# EAGLE board Logomatic-Panel-v27 (EAGLE 6.5.0), part 1 of 2
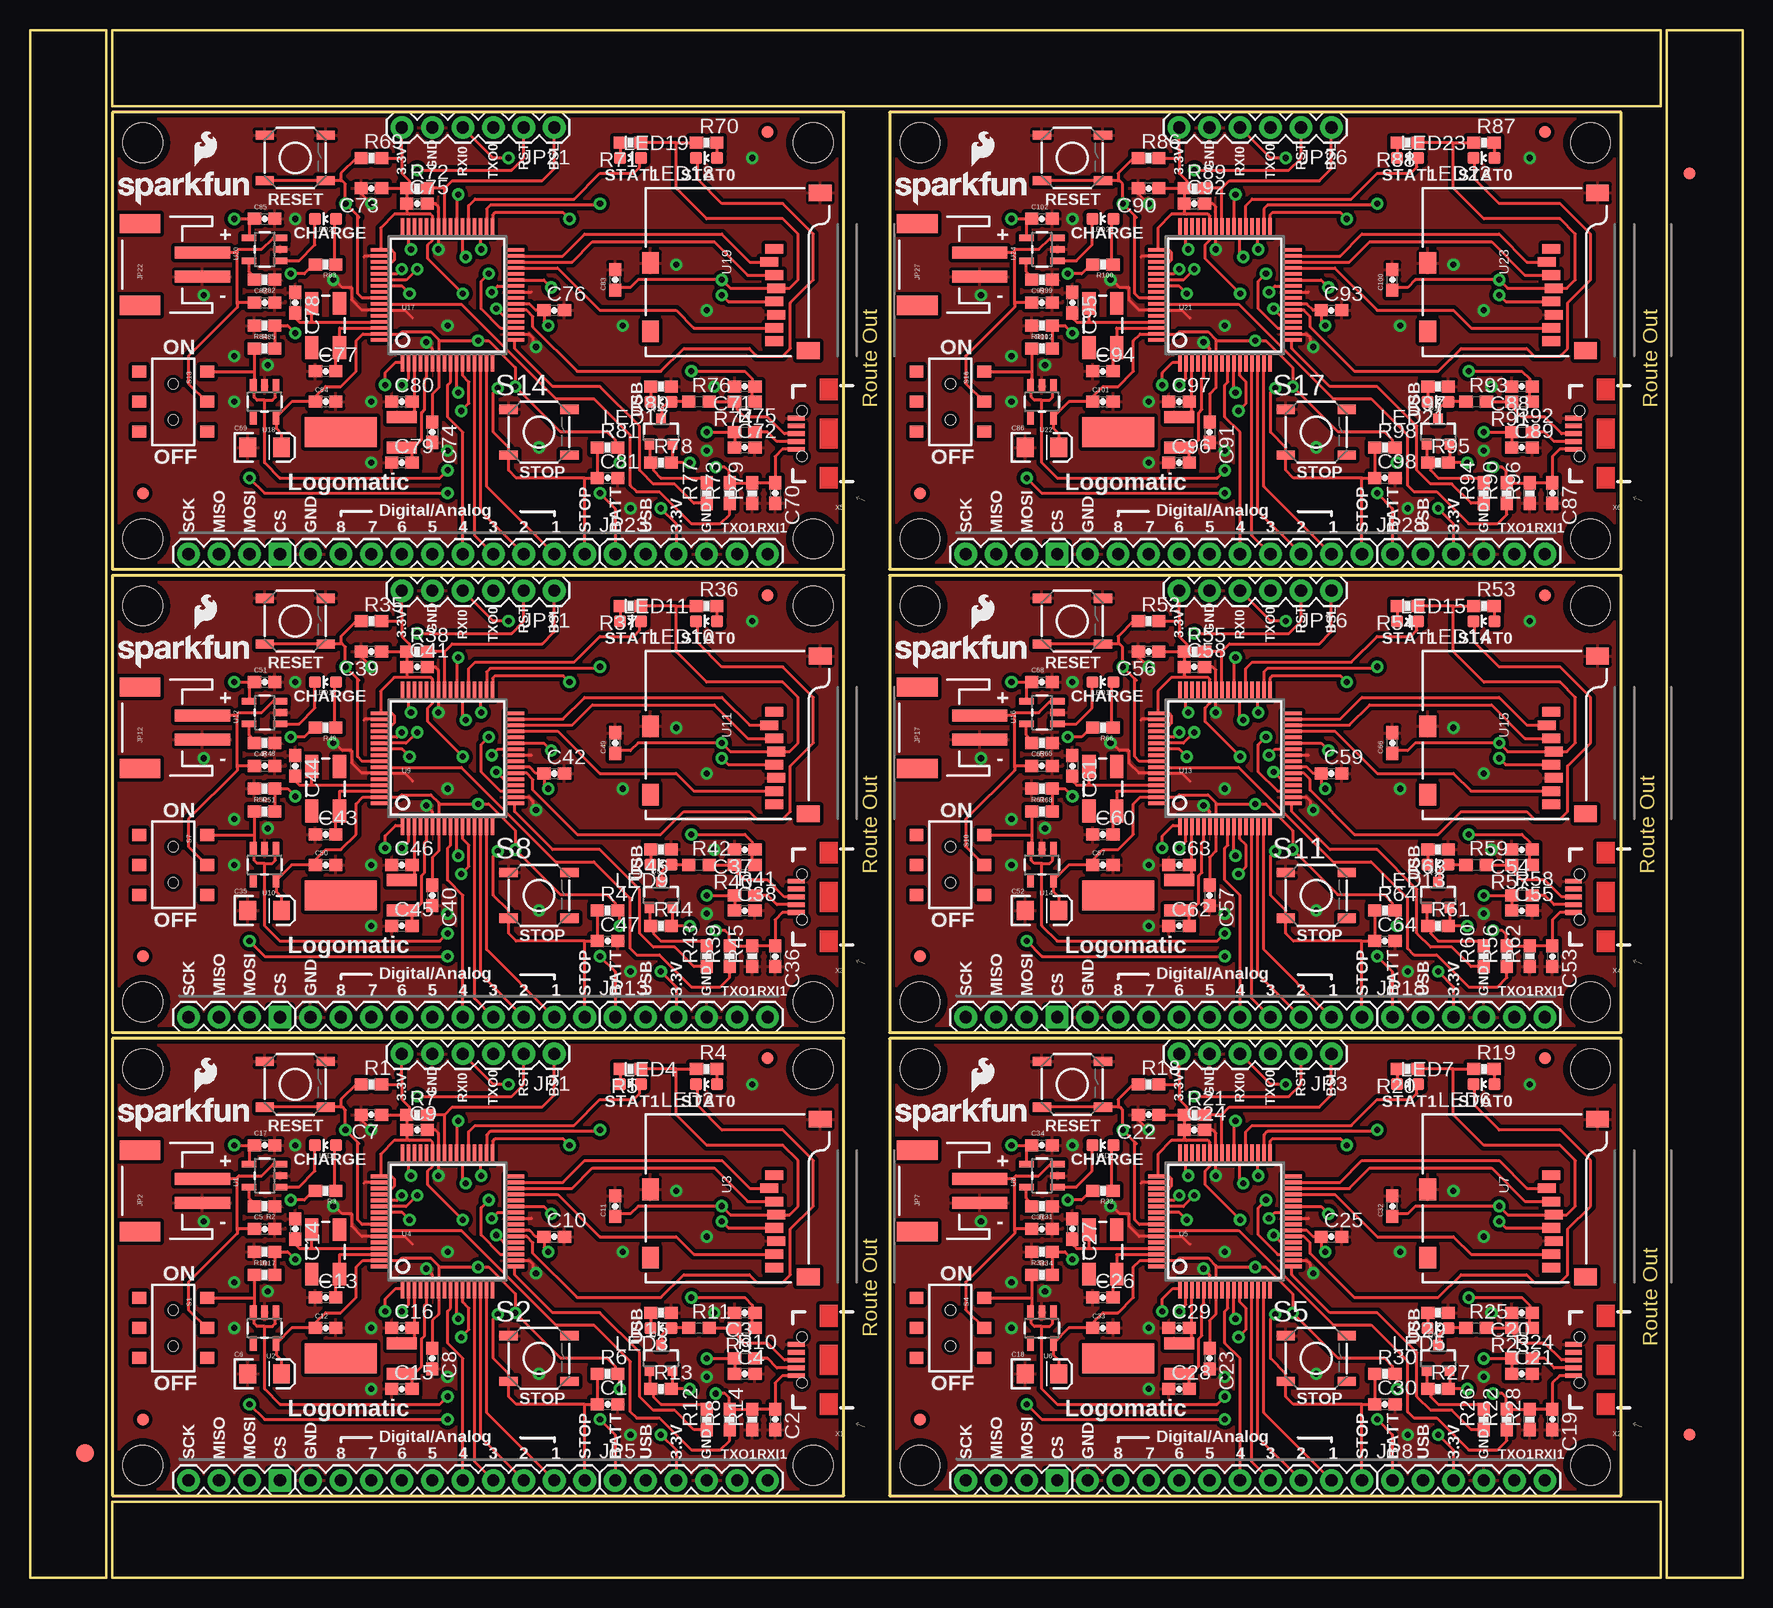
[diagram p0: board, top side]
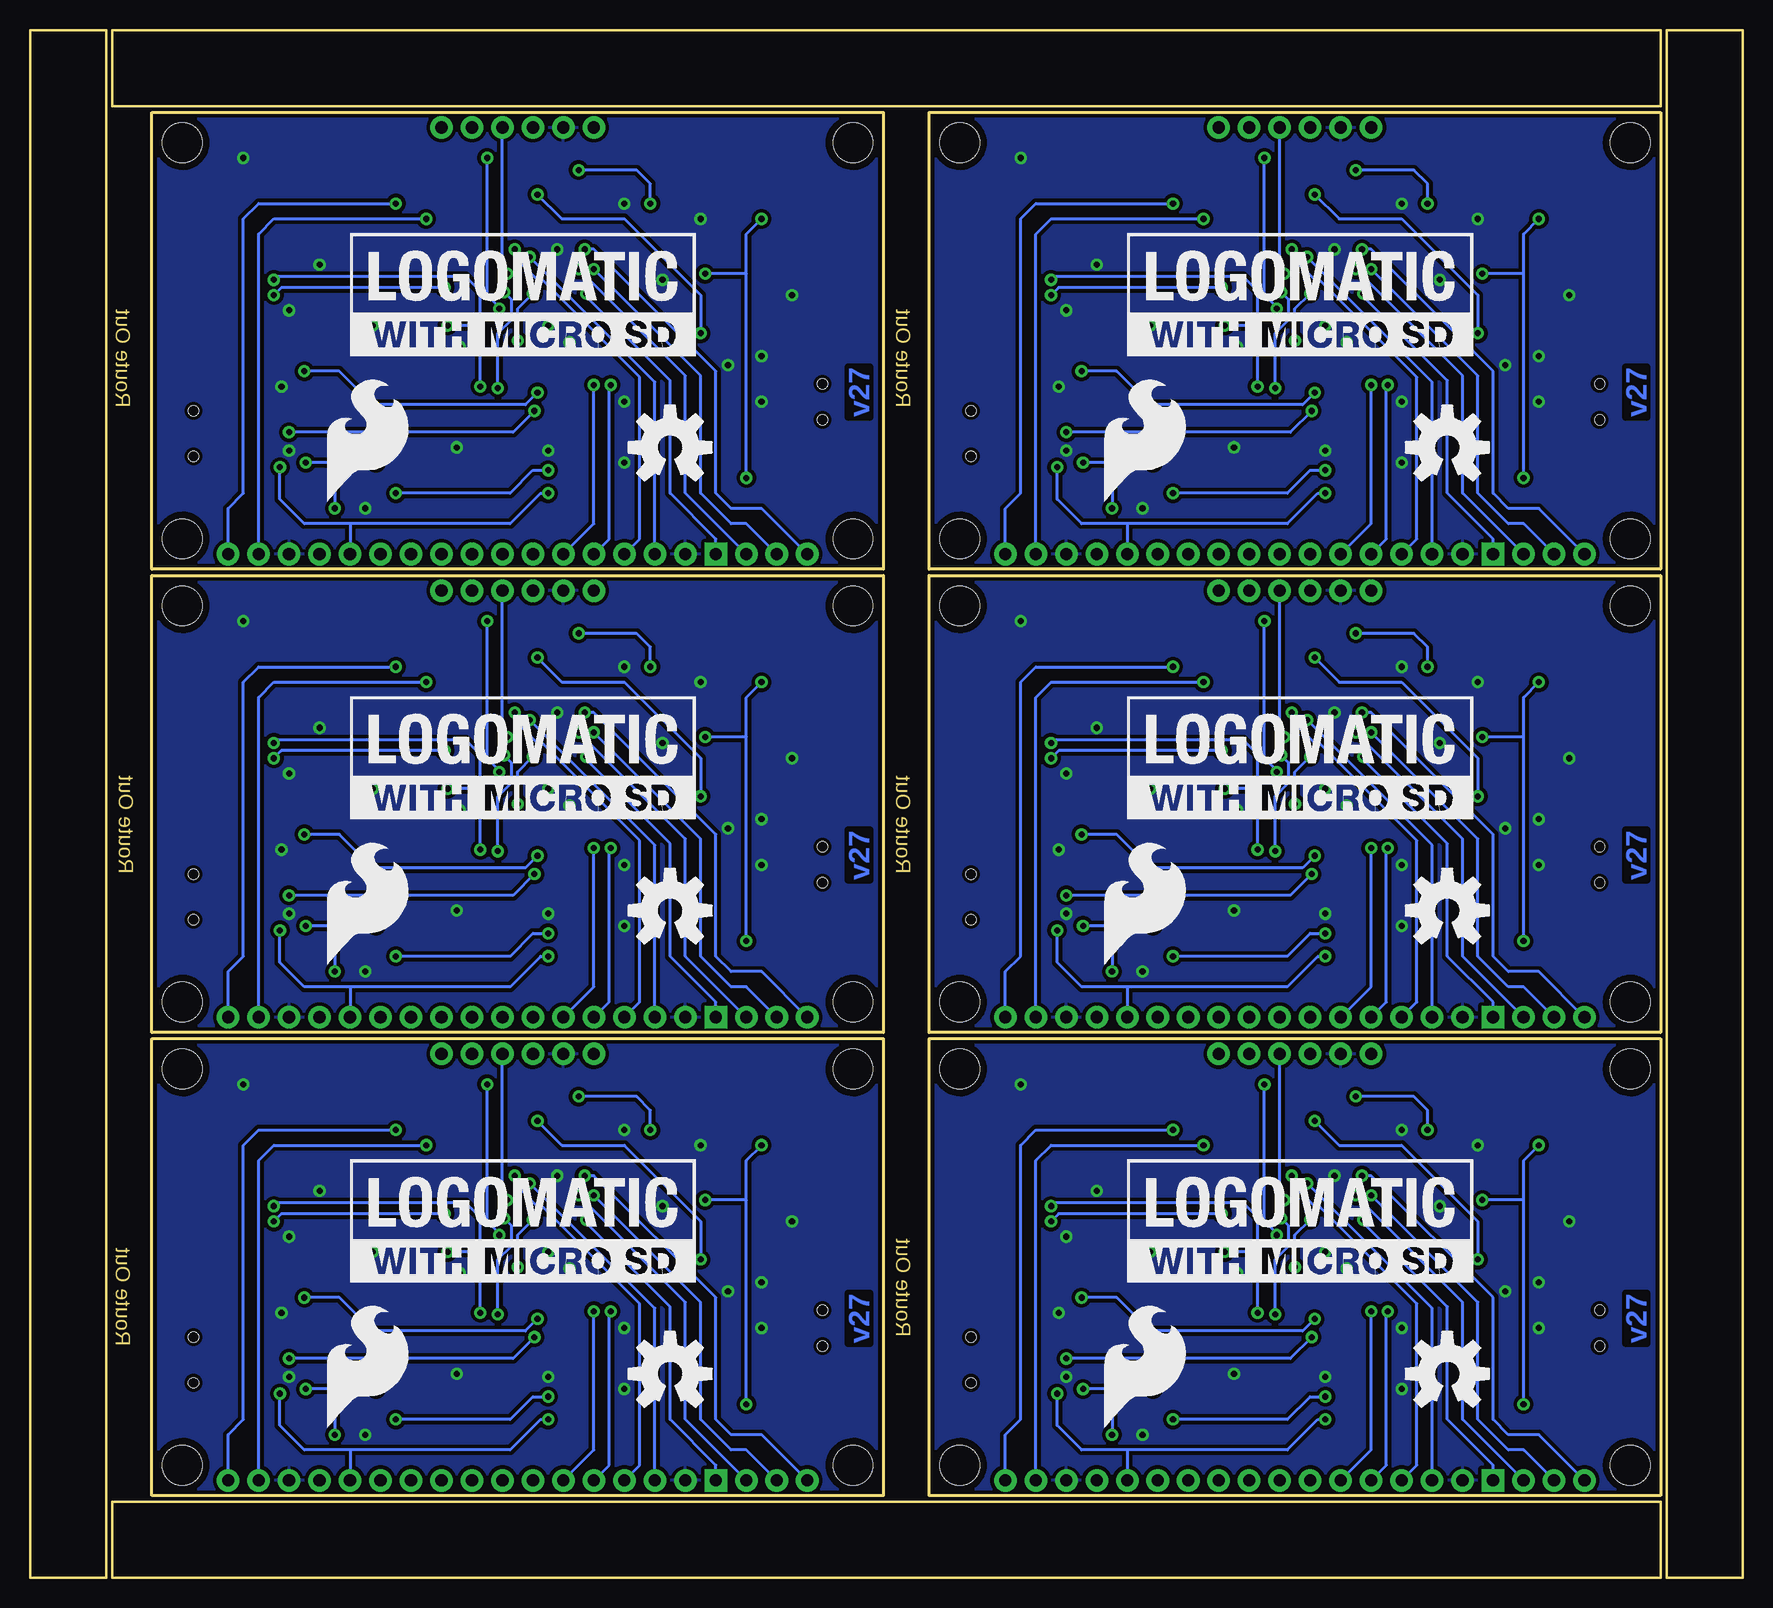
[diagram p1: board, bottom side, seen from below]

Size 142.75 x 129.03 mm. Coordinates in mm from the lower left corner, seen from the top.
Outline: 6.86,6.86 67.82,6.86 67.82,44.96 6.86,44.96 6.86,6.86
Outline: 71.63,6.86 132.59,6.86 132.59,44.96 71.63,44.96 71.63,6.86
Outline: 6.86,45.47 67.82,45.47 67.82,83.57 6.86,83.57 6.86,45.47
Outline: 71.63,45.47 132.59,45.47 132.59,83.57 71.63,83.57 71.63,45.47
Outline: 6.86,84.07 67.82,84.07 67.82,122.17 6.86,122.17 6.86,84.07
Outline: 71.63,84.07 132.59,84.07 132.59,122.17 71.63,122.17 71.63,84.07
Outline: 142.75,0 142.75,129.03 136.4,129.03 136.4,0 142.75,0
Outline: 135.89,129.03 6.86,129.03 6.86,122.68 135.89,122.68 135.89,129.03
Outline: 0,129.03 0,0 6.35,0 6.35,129.03 0,129.03
Outline: 6.86,0 135.89,0 135.89,6.35 6.86,6.35 6.86,0
Copper layers (1*16): Top 0.035mm / dielectric 1.5mm / Bottom 0.035mm
Design rules "SparkFun *": minimum track width 8mil, minimum drill 20mil, track to track 8mil, track to pad 8mil, pad to pad 7mil, via to via 8mil, smd to smd 8mil, copper to edge 10mil, drill to drill 8mil, minimum pad ring 12mil, minimum via ring 10mil, stop-mask expansion 4mil, vias tented up to drill 20mil, thermal gap 10mil
Net classes: 0 default: width 0.178 mm; 1 power: width 0.203 mm; 2 hv: width 0.254 mm, clearance 0.229 mm

## Footprints (pad centres in the part's own frame; a part is rotated, then mirrored left to right if it is on the bottom)
0603-CAP = smd 1.1 x 1: 1 -0.85,0; 2 0.85,0
EIA3216 = smd 1.4 x 1.6: A 1.4,0; C -1.4,0
FIDUCIAL-1X2 = smd 1 x 1: 1 0,0
FIDUCIAL-1.5X3 = smd 1.5 x 1.5: 1 0,0
1X06 = drill 1.016 pad 1.88: 1 0,0; 2 2.54,0; 3 5.08,0; 4 7.62,0; 5 10.16,0; 6 12.7,0
JST-2-SMD = smd 1 x 4.6: 1 -1,-3.7; 2 1,-3.7 | smd 1.6 x 3.4: NC1 -3.4,1.5; NC2 3.4,1.5
1X04 = drill 1.016 pad 1.88 square: 1 0,0 | drill 1.016 pad 1.88: 2 2.54,0; 3 5.08,0; 4 7.62,0
1X10 = drill 1.016 pad 1.88: 1 0,0; 2 2.54,0; 3 5.08,0; 4 7.62,0; 5 10.16,0; 6 12.7,0; 7 15.24,0; 8 17.78,0; 9 20.32,0; 10 22.86,0
LED-0603 = smd 1 x 1: A 0,-0.877; C 0,0.877
CRYSTAL-SMD-5X3 = smd 1.9 x 1.1: 1 -1.85,-1.15; 2 1.85,-1.15; 3 1.85,1.15; 4 -1.85,1.15
CRYSTAL-32KHZ-SMD = smd 2.5 x 6: SHEILD 0,5.08 | smd 1 x 2.5: X1 -1.27,0; X2 1.27,0
SOT23-3 = smd 0.8 x 0.9: 1 -0.95,-1; 2 0.95,-1; 3 0,1.1
0603-RES = smd 1.1 x 1: 1 -0.85,0; 2 0.85,0
0603 = smd 1.1 x 1: 1 -0.85,0; 2 0.85,0
AYZ0202 = smd 1 x 1.15: 1 -2.5,2.825; 2 0,2.825; 3 2.5,2.825; 4 -2.5,-2.825; 5 0,-2.825; 6 2.5,-2.825 | hole 0.85: 1.5,0; -1.5,0
TACTILE_SWITCH_SMD = smd 1.524 x 0.762: 1 -2.54,1.905; 2 2.54,1.905; 3 -2.54,-1.905; 4 2.54,-1.905
SOT23-5 = smd 0.55 x 1.2: 1 -0.95,-1.3; 2 0,-1.3; 3 0.95,-1.3; 4 0.95,1.3; 5 -0.95,1.3
MICRO-SD-SOCKET-PP = smd 0.8 x 1.5: 1 -8.94,10.7; 2 -7.84,10.3; 3 -6.74,10.7; 4 -5.64,10.9; 5 -4.54,10.7; 6 -3.44,10.9; 7 -2.34,10.7; 8 -1.24,10.7 | smd 1.8 x 1.4: CD1 -2.05,0.4; CD2 -7.75,0.4 | smd 1.4 x 1.9: GND1 -13.6,14.55; GND3 -0.45,13.55
SQFP-S-10X10-64 = smd 0.3 x 1.6: 1 -3.75,-5.6; 2 -3.25,-5.6; 3 -2.75,-5.6; 4 -2.25,-5.6; 5 -1.75,-5.6; 6 -1.25,-5.6; 7 -0.75,-5.6; 8 -0.25,-5.6; 9 0.25,-5.6; 10 0.75,-5.6; 11 1.25,-5.6; 12 1.75,-5.6; 13 2.25,-5.6; 14 2.75,-5.6; 15 3.25,-5.6; 16 3.75,-5.6; 33 3.75,5.6; 34 3.25,5.6; 35 2.75,5.6; 36 2.25,5.6; 37 1.75,5.6; 38 1.25,5.6; 39 0.75,5.6; 40 0.25,5.6; 41 -0.25,5.6; 42 -0.75,5.6; 43 -1.25,5.6; 44 -1.75,5.6; 45 -2.25,5.6; 46 -2.75,5.6; 47 -3.25,5.6; 48 -3.75,5.6 | smd 1.6 x 0.3: 17 5.6,-3.75; 18 5.6,-3.25; 19 5.6,-2.75; 20 5.6,-2.25; 21 5.6,-1.75; 22 5.6,-1.25; 23 5.6,-0.75; 24 5.6,-0.25; 25 5.6,0.25; 26 5.6,0.75; 27 5.6,1.25; 28 5.6,1.75; 29 5.6,2.25; 30 5.6,2.75; 31 5.6,3.25; 32 5.6,3.75; 49 -5.6,3.75; 50 -5.6,3.25; 51 -5.6,2.75; 52 -5.6,2.25; 53 -5.6,1.75; 54 -5.6,1.25; 55 -5.6,0.75; 56 -5.6,0.25; 57 -5.6,-0.25; 58 -5.6,-0.75; 59 -5.6,-1.25; 60 -5.6,-1.75; 61 -5.6,-2.25; 62 -5.6,-2.75; 63 -5.6,-3.25; 64 -5.6,-3.75
STAND-OFF = hole 3.302: 0,0
USB-B-MICRO-SMD_V03 = smd 1.4 x 0.4: D+1 2.7,0; D-1 2.7,0.65; GND1 2.7,-1.3; ID1 2.7,-0.65; VBUS1 2.7,1.3 | hole 0.85: 2.2,1.9; 2.2,-1.9

## Placement (x,y rotation side)
C1  0.1uF  [0603-CAP]  48.13,14.48 0 top
C2  0.1uF  [0603-CAP]  62.1,13.21 270 top
C3  18pF  [0603-CAP]  59.56,22.1 180 top
C4  18pF  [0603-CAP]  59.56,17.02 0 top
C5  4.7uF  [0603-CAP]  19.56,29.08 0 top
C6  10uF  [EIA3216]  19.56,17.02 0 top
C7  0.1uF  [0603-CAP]  28.45,38.61 180 top
C8  0.1uF  [0603-CAP]  33.53,18.29 270 top
C9  0.1uF  [0603-CAP]  32.26,37.34 0 top
C10  0.1uF  [0603-CAP]  43.69,28.45 0 top
C11  0.1uF  [0603-CAP]  48.77,30.99 90 top
C12  0.1uF  [0603-CAP]  24.64,20.83 0 top
C13  22pF  [0603-CAP]  24.64,23.37 0 top
C14  22pF  [0603-CAP]  22.1,29.08 270 top
C15  22pF  [0603-CAP]  30.99,15.75 0 top
C16  22pF  [0603-CAP]  30.99,20.83 0 top
C17  4.7uF  [0603-CAP]  19.56,36.07 0 top
C18  10uF  [EIA3216]  84.33,17.02 0 top
C19  0.1uF  [0603-CAP]  126.87,13.21 270 top
C20  18pF  [0603-CAP]  124.33,22.1 180 top
C21  18pF  [0603-CAP]  124.33,17.02 0 top
C22  0.1uF  [0603-CAP]  93.22,38.61 180 top
C23  0.1uF  [0603-CAP]  98.3,18.29 270 top
C24  0.1uF  [0603-CAP]  97.03,37.34 0 top
C25  0.1uF  [0603-CAP]  108.46,28.45 0 top
C26  22pF  [0603-CAP]  89.41,23.37 0 top
C27  22pF  [0603-CAP]  86.87,29.08 270 top
C28  22pF  [0603-CAP]  95.76,15.75 0 top
C29  22pF  [0603-CAP]  95.76,20.83 0 top
C30  0.1uF  [0603-CAP]  112.9,14.48 0 top
C31  4.7uF  [0603-CAP]  84.33,29.08 0 top
C32  0.1uF  [0603-CAP]  113.54,30.99 90 top
C33  0.1uF  [0603-CAP]  89.41,20.83 0 top
C34  4.7uF  [0603-CAP]  84.33,36.07 0 top
C35  10uF  [EIA3216]  19.56,55.63 0 top
C36  0.1uF  [0603-CAP]  62.1,51.82 270 top
C37  18pF  [0603-CAP]  59.56,60.71 180 top
C38  18pF  [0603-CAP]  59.56,55.63 0 top
C39  0.1uF  [0603-CAP]  28.45,77.22 180 top
C40  0.1uF  [0603-CAP]  33.53,56.9 270 top
C41  0.1uF  [0603-CAP]  32.26,75.95 0 top
C42  0.1uF  [0603-CAP]  43.69,67.06 0 top
C43  22pF  [0603-CAP]  24.64,61.98 0 top
C44  22pF  [0603-CAP]  22.1,67.69 270 top
C45  22pF  [0603-CAP]  30.99,54.36 0 top
C46  22pF  [0603-CAP]  30.99,59.44 0 top
C47  0.1uF  [0603-CAP]  48.13,53.09 0 top
C48  4.7uF  [0603-CAP]  19.56,67.69 0 top
C49  0.1uF  [0603-CAP]  48.77,69.6 90 top
C50  0.1uF  [0603-CAP]  24.64,59.44 0 top
C51  4.7uF  [0603-CAP]  19.56,74.68 0 top
C52  10uF  [EIA3216]  84.33,55.63 0 top
C53  0.1uF  [0603-CAP]  126.87,51.82 270 top
C54  18pF  [0603-CAP]  124.33,60.71 180 top
C55  18pF  [0603-CAP]  124.33,55.63 0 top
C56  0.1uF  [0603-CAP]  93.22,77.22 180 top
C57  0.1uF  [0603-CAP]  98.3,56.9 270 top
C58  0.1uF  [0603-CAP]  97.03,75.95 0 top
C59  0.1uF  [0603-CAP]  108.46,67.06 0 top
C60  22pF  [0603-CAP]  89.41,61.98 0 top
C61  22pF  [0603-CAP]  86.87,67.69 270 top
C62  22pF  [0603-CAP]  95.76,54.36 0 top
C63  22pF  [0603-CAP]  95.76,59.44 0 top
C64  0.1uF  [0603-CAP]  112.9,53.09 0 top
C65  4.7uF  [0603-CAP]  84.33,67.69 0 top
C66  0.1uF  [0603-CAP]  113.54,69.6 90 top
C67  0.1uF  [0603-CAP]  89.41,59.44 0 top
C68  4.7uF  [0603-CAP]  84.33,74.68 0 top
C69  10uF  [EIA3216]  19.56,94.23 0 top
C70  0.1uF  [0603-CAP]  62.1,90.42 270 top
C71  18pF  [0603-CAP]  59.56,99.31 180 top
C72  18pF  [0603-CAP]  59.56,94.23 0 top
C73  0.1uF  [0603-CAP]  28.45,115.82 180 top
C74  0.1uF  [0603-CAP]  33.53,95.5 270 top
C75  0.1uF  [0603-CAP]  32.26,114.55 0 top
C76  0.1uF  [0603-CAP]  43.69,105.66 0 top
C77  22pF  [0603-CAP]  24.64,100.58 0 top
C78  22pF  [0603-CAP]  22.1,106.3 270 top
C79  22pF  [0603-CAP]  30.99,92.96 0 top
C80  22pF  [0603-CAP]  30.99,98.04 0 top
C81  0.1uF  [0603-CAP]  48.13,91.69 0 top
C82  4.7uF  [0603-CAP]  19.56,106.3 0 top
C83  0.1uF  [0603-CAP]  48.77,108.2 90 top
C84  0.1uF  [0603-CAP]  24.64,98.04 0 top
C85  4.7uF  [0603-CAP]  19.56,113.28 0 top
C86  10uF  [EIA3216]  84.33,94.23 0 top
C87  0.1uF  [0603-CAP]  126.87,90.42 270 top
C88  18pF  [0603-CAP]  124.33,99.31 180 top
C89  18pF  [0603-CAP]  124.33,94.23 0 top
C90  0.1uF  [0603-CAP]  93.22,115.82 180 top
C91  0.1uF  [0603-CAP]  98.3,95.5 270 top
C92  0.1uF  [0603-CAP]  97.03,114.55 0 top
C93  0.1uF  [0603-CAP]  108.46,105.66 0 top
C94  22pF  [0603-CAP]  89.41,100.58 0 top
C95  22pF  [0603-CAP]  86.87,106.3 270 top
C96  22pF  [0603-CAP]  95.76,92.96 0 top
C97  22pF  [0603-CAP]  95.76,98.04 0 top
C98  0.1uF  [0603-CAP]  112.9,91.69 0 top
C99  4.7uF  [0603-CAP]  84.33,106.3 0 top
C100  0.1uF  [0603-CAP]  113.54,108.2 90 top
C101  0.1uF  [0603-CAP]  89.41,98.04 0 top
C102  4.7uF  [0603-CAP]  84.33,113.28 0 top
E$1  [FIDUCIAL-1X2]  138.3,11.94 0 top
E$2  [FIDUCIAL-1X2]  138.3,117.09 180 top
E$3  [FIDUCIAL-1.5X3]  4.57,10.41 0 top
JP1  Prog  [1X06]  43.69,43.69 180 top
JP2  LiPo  [JST-2-SMD]  10.67,32.26 90 top
JP3  Prog  [1X06]  108.46,43.69 180 top
JP4  [1X04]  20.83,8.13 180 top
JP5  [1X06]  48.77,8.13 0 top
JP6  M100.1  [1X10]  46.23,8.13 180 top
JP7  LiPo  [JST-2-SMD]  75.44,32.26 90 top
JP8  [1X06]  113.54,8.13 0 top
JP9  [1X04]  85.6,8.13 180 top
JP10  M100.1  [1X10]  111,8.13 180 top
JP11  Prog  [1X06]  43.69,82.3 180 top
JP12  LiPo  [JST-2-SMD]  10.67,70.87 90 top
JP13  [1X06]  48.77,46.74 0 top
JP14  [1X04]  20.83,46.74 180 top
JP15  M100.1  [1X10]  46.23,46.74 180 top
JP16  Prog  [1X06]  108.46,82.3 180 top
JP17  LiPo  [JST-2-SMD]  75.44,70.87 90 top
JP18  [1X06]  113.54,46.74 0 top
JP19  [1X04]  85.6,46.74 180 top
JP20  M100.1  [1X10]  111,46.74 180 top
JP21  Prog  [1X06]  43.69,120.9 180 top
JP22  LiPo  [JST-2-SMD]  10.67,109.47 90 top
JP23  [1X06]  48.77,85.34 0 top
JP24  [1X04]  20.83,85.34 180 top
JP25  M100.1  [1X10]  46.23,85.34 180 top
JP26  Prog  [1X06]  108.46,120.9 180 top
JP27  LiPo  [JST-2-SMD]  75.44,109.47 90 top
JP28  [1X06]  113.54,85.34 0 top
JP29  [1X04]  85.6,85.34 180 top
JP30  M100.1  [1X10]  111,85.34 180 top
LED1  LED RED  [LED-0603]  24.64,36.07 90 top
LED2  RED  [LED-0603]  56.39,41.15 90 top
LED3  [LED-0603]  52.58,20.83 90 top
LED4  GREEN  [LED-0603]  50.04,41.15 270 top
LED5  [LED-0603]  117.35,20.83 90 top
LED6  RED  [LED-0603]  121.16,41.15 90 top
LED7  GREEN  [LED-0603]  114.81,41.15 270 top
LED8  LED RED  [LED-0603]  89.41,36.07 90 top
LED9  [LED-0603]  52.58,59.44 90 top
LED10  RED  [LED-0603]  56.39,79.76 90 top
LED11  GREEN  [LED-0603]  50.04,79.76 270 top
LED12  LED RED  [LED-0603]  24.64,74.68 90 top
LED13  [LED-0603]  117.35,59.44 90 top
LED14  RED  [LED-0603]  121.16,79.76 90 top
LED15  GREEN  [LED-0603]  114.81,79.76 270 top
LED16  LED RED  [LED-0603]  89.41,74.68 90 top
LED17  [LED-0603]  52.58,98.04 90 top
LED18  RED  [LED-0603]  56.39,118.36 90 top
LED19  GREEN  [LED-0603]  50.04,118.36 270 top
LED20  LED RED  [LED-0603]  24.64,113.28 90 top
LED21  [LED-0603]  117.35,98.04 90 top
LED22  RED  [LED-0603]  121.16,118.36 90 top
LED23  GREEN  [LED-0603]  114.81,118.36 270 top
LED24  LED RED  [LED-0603]  89.41,113.28 90 top
LOGO1  OSHW-LOGOL  [OSHW-LOGO-L]  24.64,17.02 0 bottom
LOGO2  SFE_LOGO_NAME.1_INCH  [SFE_LOGO_NAME_.1]  6.86,36.7 0 top
LOGO3  SFE_LOGO_FLAME.4_INCH  [SFE_LOGO_FLAME_.4]  53.85,11.94 0 bottom
LOGO4  OSHW-LOGOL  [OSHW-LOGO-L]  89.41,17.02 0 bottom
LOGO5  SFE_LOGO_NAME.1_INCH  [SFE_LOGO_NAME_.1]  71.63,36.7 0 top
LOGO6  SFE_LOGO_FLAME.4_INCH  [SFE_LOGO_FLAME_.4]  118.62,11.94 0 bottom
LOGO7  OSHW-LOGOL  [OSHW-LOGO-L]  24.64,55.63 0 bottom
LOGO8  SFE_LOGO_NAME.1_INCH  [SFE_LOGO_NAME_.1]  6.86,75.31 0 top
LOGO9  SFE_LOGO_FLAME.4_INCH  [SFE_LOGO_FLAME_.4]  53.85,50.55 0 bottom
LOGO10  OSHW-LOGOL  [OSHW-LOGO-L]  89.41,55.63 0 bottom
LOGO11  SFE_LOGO_NAME.1_INCH  [SFE_LOGO_NAME_.1]  71.63,75.31 0 top
LOGO12  SFE_LOGO_FLAME.4_INCH  [SFE_LOGO_FLAME_.4]  118.62,50.55 0 bottom
LOGO13  OSHW-LOGOL  [OSHW-LOGO-L]  24.64,94.23 0 bottom
LOGO14  SFE_LOGO_NAME.1_INCH  [SFE_LOGO_NAME_.1]  6.86,113.92 0 top
LOGO15  SFE_LOGO_FLAME.4_INCH  [SFE_LOGO_FLAME_.4]  53.85,89.15 0 bottom
LOGO16  OSHW-LOGOL  [OSHW-LOGO-L]  89.41,94.23 0 bottom
LOGO17  SFE_LOGO_NAME.1_INCH  [SFE_LOGO_NAME_.1]  71.63,113.92 0 top
LOGO18  SFE_LOGO_FLAME.4_INCH  [SFE_LOGO_FLAME_.4]  118.62,89.15 0 bottom
Q1  12MHz  [CRYSTAL-SMD-5X3]  24.64,27.18 270 top
Q2  32kHz  [CRYSTAL-32KHZ-SMD]  30.99,18.29 90 top
Q3  12MHz  [CRYSTAL-SMD-5X3]  89.41,27.18 270 top
Q4  TRANSISTOR_PNPSMD  [SOT23-3]  52.58,18.29 0 top
Q5  32kHz  [CRYSTAL-32KHZ-SMD]  95.76,18.29 90 top
Q6  TRANSISTOR_PNPSMD  [SOT23-3]  117.35,18.29 0 top
Q7  12MHz  [CRYSTAL-SMD-5X3]  24.64,65.79 270 top
Q8  32kHz  [CRYSTAL-32KHZ-SMD]  30.99,56.9 90 top
Q9  TRANSISTOR_PNPSMD  [SOT23-3]  52.58,56.9 0 top
Q10  12MHz  [CRYSTAL-SMD-5X3]  89.41,65.79 270 top
Q11  32kHz  [CRYSTAL-32KHZ-SMD]  95.76,56.9 90 top
Q12  TRANSISTOR_PNPSMD  [SOT23-3]  117.35,56.9 0 top
Q13  12MHz  [CRYSTAL-SMD-5X3]  24.64,104.39 270 top
Q14  32kHz  [CRYSTAL-32KHZ-SMD]  30.99,95.5 90 top
Q15  TRANSISTOR_PNPSMD  [SOT23-3]  52.58,95.5 0 top
Q16  12MHz  [CRYSTAL-SMD-5X3]  89.41,104.39 270 top
Q17  32kHz  [CRYSTAL-32KHZ-SMD]  95.76,95.5 90 top
Q18  TRANSISTOR_PNPSMD  [SOT23-3]  117.35,95.5 0 top
R1  10K  [0603-RES]  28.45,41.15 0 top
R2  2K  [0603-RES]  19.56,30.99 180 top
R3  330  [0603-RES]  24.64,32.26 180 top
R4  330  [0603-RES]  56.39,42.42 0 top
R5  330  [0603-RES]  50.04,42.42 180 top
R6  10K  [0603-RES]  48.13,17.02 0 top
R7  10K  [0603-RES]  32.26,38.61 0 top
R8  10k  [0603-RES]  58.29,13.21 90 top
R9  33  [0603]  59.56,20.83 180 top
R10  33  [0603]  59.56,18.29 0 top
R11  1.5k  [0603]  55.75,20.83 0 top
R12  1k  [0603-RES]  56.39,13.21 90 top
R13  10k  [0603-RES]  52.58,15.75 0 top
R14  100k  [0603-RES]  60.2,13.21 90 top
R15  330  [0603-RES]  52.58,22.1 180 top
R16  1M  [0603-RES]  19.56,25.27 0 top
R17  1M  [0603-RES]  19.56,27.18 180 top
R18  10K  [0603-RES]  93.22,41.15 0 top
R19  330  [0603-RES]  121.16,42.42 0 top
R20  330  [0603-RES]  114.81,42.42 180 top
R21  10K  [0603-RES]  97.03,38.61 0 top
R22  10k  [0603-RES]  123.06,13.21 90 top
R23  33  [0603]  124.33,20.83 180 top
R24  33  [0603]  124.33,18.29 0 top
R25  1.5k  [0603]  120.52,20.83 0 top
R26  1k  [0603-RES]  121.16,13.21 90 top
R27  10k  [0603-RES]  117.35,15.75 0 top
R28  100k  [0603-RES]  124.97,13.21 90 top
R29  330  [0603-RES]  117.35,22.1 180 top
R30  10K  [0603-RES]  112.9,17.02 0 top
R31  2K  [0603-RES]  84.33,30.99 180 top
R32  330  [0603-RES]  89.41,32.26 180 top
R33  1M  [0603-RES]  84.33,25.27 0 top
R34  1M  [0603-RES]  84.33,27.18 180 top
R35  10K  [0603-RES]  28.45,79.76 0 top
R36  330  [0603-RES]  56.39,81.03 0 top
R37  330  [0603-RES]  50.04,81.03 180 top
R38  10K  [0603-RES]  32.26,77.22 0 top
R39  10k  [0603-RES]  58.29,51.82 90 top
R40  33  [0603]  59.56,59.44 180 top
R41  33  [0603]  59.56,56.9 0 top
R42  1.5k  [0603]  55.75,59.44 0 top
R43  1k  [0603-RES]  56.39,51.82 90 top
R44  10k  [0603-RES]  52.58,54.36 0 top
R45  100k  [0603-RES]  60.2,51.82 90 top
R46  330  [0603-RES]  52.58,60.71 180 top
R47  10K  [0603-RES]  48.13,55.63 0 top
R48  2K  [0603-RES]  19.56,69.6 180 top
R49  330  [0603-RES]  24.64,70.87 180 top
R50  1M  [0603-RES]  19.56,63.88 0 top
R51  1M  [0603-RES]  19.56,65.79 180 top
R52  10K  [0603-RES]  93.22,79.76 0 top
R53  330  [0603-RES]  121.16,81.03 0 top
R54  330  [0603-RES]  114.81,81.03 180 top
R55  10K  [0603-RES]  97.03,77.22 0 top
R56  10k  [0603-RES]  123.06,51.82 90 top
R57  33  [0603]  124.33,59.44 180 top
R58  33  [0603]  124.33,56.9 0 top
R59  1.5k  [0603]  120.52,59.44 0 top
R60  1k  [0603-RES]  121.16,51.82 90 top
R61  10k  [0603-RES]  117.35,54.36 0 top
R62  100k  [0603-RES]  124.97,51.82 90 top
R63  330  [0603-RES]  117.35,60.71 180 top
R64  10K  [0603-RES]  112.9,55.63 0 top
R65  2K  [0603-RES]  84.33,69.6 180 top
R66  330  [0603-RES]  89.41,70.87 180 top
R67  1M  [0603-RES]  84.33,63.88 0 top
R68  1M  [0603-RES]  84.33,65.79 180 top
R69  10K  [0603-RES]  28.45,118.36 0 top
R70  330  [0603-RES]  56.39,119.63 0 top
R71  330  [0603-RES]  50.04,119.63 180 top
R72  10K  [0603-RES]  32.26,115.82 0 top
R73  10k  [0603-RES]  58.29,90.42 90 top
R74  33  [0603]  59.56,98.04 180 top
R75  33  [0603]  59.56,95.5 0 top
R76  1.5k  [0603]  55.75,98.04 0 top
R77  1k  [0603-RES]  56.39,90.42 90 top
R78  10k  [0603-RES]  52.58,92.96 0 top
R79  100k  [0603-RES]  60.2,90.42 90 top
R80  330  [0603-RES]  52.58,99.31 180 top
R81  10K  [0603-RES]  48.13,94.23 0 top
R82  2K  [0603-RES]  19.56,108.2 180 top
R83  330  [0603-RES]  24.64,109.47 180 top
R84  1M  [0603-RES]  19.56,102.49 0 top
R85  1M  [0603-RES]  19.56,104.39 180 top
R86  10K  [0603-RES]  93.22,118.36 0 top
R87  330  [0603-RES]  121.16,119.63 0 top
R88  330  [0603-RES]  114.81,119.63 180 top
R89  10K  [0603-RES]  97.03,115.82 0 top
R90  10k  [0603-RES]  123.06,90.42 90 top
R91  33  [0603]  124.33,98.04 180 top
R92  33  [0603]  124.33,95.5 0 top
R93  1.5k  [0603]  120.52,98.04 0 top
R94  1k  [0603-RES]  121.16,90.42 90 top
R95  10k  [0603-RES]  117.35,92.96 0 top
R96  100k  [0603-RES]  124.97,90.42 90 top
R97  330  [0603-RES]  117.35,99.31 180 top
R98  10K  [0603-RES]  112.9,94.23 0 top
R99  2K  [0603-RES]  84.33,108.2 180 top
R100  330  [0603-RES]  89.41,109.47 180 top
R101  1M  [0603-RES]  84.33,102.49 0 top
R102  1M  [0603-RES]  84.33,104.39 180 top
S1  [AYZ0202]  11.94,20.83 270 top
S2  Stop  [TACTILE_SWITCH_SMD]  42.42,18.29 0 top
S3  Reset  [TACTILE_SWITCH_SMD]  22.1,41.15 0 top
S4  [AYZ0202]  76.71,20.83 270 top
S5  Stop  [TACTILE_SWITCH_SMD]  107.19,18.29 0 top
S6  Reset  [TACTILE_SWITCH_SMD]  86.87,41.15 0 top
S7  [AYZ0202]  11.94,59.44 270 top
S8  Stop  [TACTILE_SWITCH_SMD]  42.42,56.9 0 top
S9  Reset  [TACTILE_SWITCH_SMD]  22.1,79.76 0 top
S10  [AYZ0202]  76.71,59.44 270 top
S11  Stop  [TACTILE_SWITCH_SMD]  107.19,56.9 0 top
S12  Reset  [TACTILE_SWITCH_SMD]  86.87,79.76 0 top
S13  [AYZ0202]  11.94,98.04 270 top
S14  Stop  [TACTILE_SWITCH_SMD]  42.42,95.5 0 top
S15  Reset  [TACTILE_SWITCH_SMD]  22.1,118.36 0 top
S16  [AYZ0202]  76.71,98.04 270 top
S17  Stop  [TACTILE_SWITCH_SMD]  107.19,95.5 0 top
S18  Reset  [TACTILE_SWITCH_SMD]  86.87,118.36 0 top
U1  MCP73831  [SOT23-5]  19.56,33.53 90 top
U2  3.3V  [SOT23-5]  19.56,20.83 180 top
U3  USD-SOCKETNEW  [MICRO-SD-SOCKET-PP]  51.31,24.64 270 top
U4  LPC213X  [SQFP-S-10X10-64]  34.8,29.72 0 top
U5  LPC213X  [SQFP-S-10X10-64]  99.57,29.72 0 top
U6  3.3V  [SOT23-5]  84.33,20.83 180 top
U7  USD-SOCKETNEW  [MICRO-SD-SOCKET-PP]  116.08,24.64 270 top
U8  MCP73831  [SOT23-5]  84.33,33.53 90 top
U9  LPC213X  [SQFP-S-10X10-64]  34.8,68.33 0 top
U10  3.3V  [SOT23-5]  19.56,59.44 180 top
U11  USD-SOCKETNEW  [MICRO-SD-SOCKET-PP]  51.31,63.25 270 top
U12  MCP73831  [SOT23-5]  19.56,72.14 90 top
U13  LPC213X  [SQFP-S-10X10-64]  99.57,68.33 0 top
U14  3.3V  [SOT23-5]  84.33,59.44 180 top
U15  USD-SOCKETNEW  [MICRO-SD-SOCKET-PP]  116.08,63.25 270 top
U16  MCP73831  [SOT23-5]  84.33,72.14 90 top
U17  LPC213X  [SQFP-S-10X10-64]  34.8,106.93 0 top
U18  3.3V  [SOT23-5]  19.56,98.04 180 top
U19  USD-SOCKETNEW  [MICRO-SD-SOCKET-PP]  51.31,101.85 270 top
U20  MCP73831  [SOT23-5]  19.56,110.74 90 top
U21  LPC213X  [SQFP-S-10X10-64]  99.57,106.93 0 top
U22  3.3V  [SOT23-5]  84.33,98.04 180 top
U23  USD-SOCKETNEW  [MICRO-SD-SOCKET-PP]  116.08,101.85 270 top
U24  MCP73831  [SOT23-5]  84.33,110.74 90 top
U$1  FIDUCIAL1X2  [FIDUCIAL-1X2]  9.4,13.21 0 top
U$2  FIDUCIAL1X2  [FIDUCIAL-1X2]  61.47,43.31 0 top
U$3  STAND-OFF  [STAND-OFF]  9.4,9.4 0 top
U$4  STAND-OFF  [STAND-OFF]  65.28,9.4 0 top
U$5  STAND-OFF  [STAND-OFF]  9.4,42.42 0 top
U$6  LOGOMATIC_LOGO  [LOGOMATIC_LOGO]  51.31,24.64 0 bottom
U$7  LOGO-SFESK  [SFE-LOGO-FLAME]  13.72,40.51 0 top
U$8  STAND-OFF  [STAND-OFF]  65.28,42.42 0 top
U$9  FIDUCIAL1X2  [FIDUCIAL-1X2]  74.17,13.21 0 top
U$10  FIDUCIAL1X2  [FIDUCIAL-1X2]  126.24,43.31 0 top
U$11  STAND-OFF  [STAND-OFF]  74.17,9.4 0 top
U$12  STAND-OFF  [STAND-OFF]  130.05,9.4 0 top
U$13  STAND-OFF  [STAND-OFF]  74.17,42.42 0 top
U$14  STAND-OFF  [STAND-OFF]  130.05,42.42 0 top
U$15  LOGO-SFESK  [SFE-LOGO-FLAME]  78.49,40.51 0 top
U$16  LOGOMATIC_LOGO  [LOGOMATIC_LOGO]  116.08,24.64 0 bottom
U$17  FIDUCIAL1X2  [FIDUCIAL-1X2]  9.4,51.82 0 top
U$18  FIDUCIAL1X2  [FIDUCIAL-1X2]  61.47,81.92 0 top
U$19  STAND-OFF  [STAND-OFF]  9.4,48.01 0 top
U$20  STAND-OFF  [STAND-OFF]  65.28,48.01 0 top
U$21  STAND-OFF  [STAND-OFF]  9.4,81.03 0 top
U$22  STAND-OFF  [STAND-OFF]  65.28,81.03 0 top
U$23  LOGO-SFESK  [SFE-LOGO-FLAME]  13.72,79.12 0 top
U$24  LOGOMATIC_LOGO  [LOGOMATIC_LOGO]  51.31,63.25 0 bottom
U$25  FIDUCIAL1X2  [FIDUCIAL-1X2]  74.17,51.82 0 top
U$26  FIDUCIAL1X2  [FIDUCIAL-1X2]  126.24,81.92 0 top
U$27  STAND-OFF  [STAND-OFF]  74.17,48.01 0 top
U$28  STAND-OFF  [STAND-OFF]  130.05,48.01 0 top
U$29  STAND-OFF  [STAND-OFF]  74.17,81.03 0 top
U$30  STAND-OFF  [STAND-OFF]  130.05,81.03 0 top
U$31  LOGO-SFESK  [SFE-LOGO-FLAME]  78.49,79.12 0 top
U$32  LOGOMATIC_LOGO  [LOGOMATIC_LOGO]  116.08,63.25 0 bottom
U$33  FIDUCIAL1X2  [FIDUCIAL-1X2]  9.4,90.42 0 top
U$34  FIDUCIAL1X2  [FIDUCIAL-1X2]  61.47,120.52 0 top
U$35  STAND-OFF  [STAND-OFF]  9.4,86.61 0 top
U$36  STAND-OFF  [STAND-OFF]  65.28,86.61 0 top
U$37  STAND-OFF  [STAND-OFF]  9.4,119.63 0 top
U$38  STAND-OFF  [STAND-OFF]  65.28,119.63 0 top
U$39  LOGO-SFESK  [SFE-LOGO-FLAME]  13.72,117.73 0 top
U$40  LOGOMATIC_LOGO  [LOGOMATIC_LOGO]  51.31,101.85 0 bottom
U$41  FIDUCIAL1X2  [FIDUCIAL-1X2]  74.17,90.42 0 top
U$42  FIDUCIAL1X2  [FIDUCIAL-1X2]  126.24,120.52 0 top
U$43  STAND-OFF  [STAND-OFF]  74.17,86.61 0 top
U$44  STAND-OFF  [STAND-OFF]  130.05,86.61 0 top
U$45  STAND-OFF  [STAND-OFF]  74.17,119.63 0 top
U$46  STAND-OFF  [STAND-OFF]  130.05,119.63 0 top
U$47  LOGO-SFESK  [SFE-LOGO-FLAME]  78.49,117.73 0 top
U$48  LOGOMATIC_LOGO  [LOGOMATIC_LOGO]  116.08,101.85 0 bottom
X1  USB_MICROB_PLUGCONN-11752  [USB-B-MICRO-SMD_V03]  66.55,18.16 180 top
X2  USB_MICROB_PLUGCONN-11752  [USB-B-MICRO-SMD_V03]  131.32,18.16 180 top
X3  USB_MICROB_PLUGCONN-11752  [USB-B-MICRO-SMD_V03]  66.55,56.77 180 top
X4  USB_MICROB_PLUGCONN-11752  [USB-B-MICRO-SMD_V03]  131.32,56.77 180 top
X5  USB_MICROB_PLUGCONN-11752  [USB-B-MICRO-SMD_V03]  66.55,95.38 180 top
X6  USB_MICROB_PLUGCONN-11752  [USB-B-MICRO-SMD_V03]  131.32,95.38 180 top

## Library data of the parts
C1 C2 C7-C12 C19 C22-C25 C30 C32 C33 C36 C39-C42 C47 C49 C50 C53 C56-C59 C64 C66 C67 C70 C73-C76 C81 C83 C84 C87 C90-C93 C98 C100 C101 = SparkFun-Capacitors; PROD_ID: CAP-00810
C3 C4 C20 C21 C37 C38 C54 C55 C71 C72 C88 C89 = SparkFun-Capacitors; PROD_ID: CAP-08267
C5 C17 C31 C34 C48 C51 C65 C68 C82 C85 C99 C102 = SparkFun-Capacitors; PROD_ID: CAP-08280
C6 C18 C35 C52 C69 C86 = SparkFun-Capacitors; PROD_ID: CAP-00811
C13-C16 C26-C29 C43-C46 C60-C63 C77-C80 C94-C97 = SparkFun-Capacitors; PROD_ID: CAP-07876
E$1 E$2 LOGO1-LOGO18 U$6 U$16 U$24 U$32 U$40 U$48 = SparkFun-Aesthetics
E$3 = SparkFun-Retired
JP1-JP30 Q2 Q4-Q6 Q8 Q9 Q11 Q12 Q14 Q15 Q17 Q18 S1 S4 S7 S10 S13 S16 U1 U2 U4-U6 U8-U10 U12-U14 U16-U18 U20-U22 U24 U$1-U$5 U$7-U$15 U$17-U$23 U$25-U$31 U$33-U$39 U$41-U$47 = SparkFun
LED1 LED3 LED5 LED8 LED9 LED12 LED13 LED16 LED17 LED20 LED21 LED24 = SparkFun-LED; PROD_ID: DIO-00819; VALUE: RED
LED2 LED6 LED10 LED14 LED18 LED22 = SparkFun-LED; PROD_ID: DIO-00819
LED4 LED7 LED11 LED15 LED19 LED23 = SparkFun-LED; PROD_ID: DIO-00821
Q1 Q3 Q7 Q10 Q13 Q16 S2 S3 S5 S6 S8 S9 S11 S12 S14 S15 S17 S18 = SparkFunEagle-6-6-07
R1 R6 R7 R18 R21 R30 R35 R38 R47 R52 R55 R64 R69 R72 R81 R86 R89 R98 = SparkFun-Resistors; PROD_ID: RES-00824
R2 R31 R48 R65 R82 R99 = SparkFun-Resistors; PROD_ID: RES-08296; VALUE: 2.0k
R3-R5 R15 R19 R20 R29 R32 R36 R37 R46 R49 R53 R54 R63 R66 R70 R71 R80 R83 R87 R88 R97 R100 = SparkFun-Resistors; PROD_ID: RES-00818
R8 R13 R22 R27 R39 R44 R56 R61 R73 R78 R90 R95 = SparkFun-Resistors; PROD_ID: RES-00824; VALUE: 10K
R9 R10 R23 R24 R40 R41 R57 R58 R74 R75 R91 R92 = SparkFun-Resistors; PROD_ID: RES-08270; VALUE: 33OHM
R11 R25 R42 R59 R76 R93 = SparkFun-Resistors; PROD_ID: RES-08306; VALUE: 1.5KOHM
R12 R26 R43 R60 R77 R94 = SparkFun-Resistors; PROD_ID: RES-07856; VALUE: 1K
R14 R28 R45 R62 R79 R96 = SparkFun-Resistors; PROD_ID: RES-07828
R16 R17 R33 R34 R50 R51 R67 R68 R84 R85 R101 R102 = SparkFun-Resistors; PROD_ID: RES-07868
U3 U7 U11 U15 U19 U23 = SparkFun-Connectors
X1-X6 = SparkFun-Connectors; PROD_ID: CONN-11752

## Nets
BATTLVL: R16.2 R17.1 U4.39
BATTLVL1: R33.2 R34.1 U5.39
BATTLVL2: R50.2 R51.1 U9.39
BATTLVL3: R67.2 R68.1 U13.39
BATTLVL4: R84.2 R85.1 U17.39
BATTLVL5: R101.2 R102.1 U21.39
BSL: JP1.1 R7.2 U4.41
BSL1: JP3.1 R21.2 U5.41
BSL2: JP11.1 R38.2 U9.41
BSL3: JP16.1 R55.2 U13.41
BSL4: JP21.1 R72.2 U17.41
BSL5: JP26.1 R89.2 U21.41
CS0: U3.2 U4.31
CS1: JP4.1 U4.55
CS2: U5.31 U7.2
CS3: JP9.1 U5.55
CS4: U9.31 U11.2
CS5: JP14.1 U9.55
CS6: U13.31 U15.2
CS7: JP19.1 U13.55
CS8: U17.31 U19.2
CS9: JP24.1 U17.55
CS10: U21.31 U23.2
CS11: JP29.1 U21.55
GND [power]: C1.2 C2.2 C3.2 C4.2 C5.2 C6.C C7.2 C8.2 C9.2 C10.2 C11.2 C12.2 C13.1 C14.1 C15.1 C16.1 C17.2 JP1.5 JP2.1 JP5.4 JP6.10 R2.1 R14.1 R15.1 R17.2 S2.1 S3.1 S3.2 U1.2 U2.2 U3.6 U3.CD2 U3.GND1 U4.6 U4.18 U4.25 U4.42 U4.50 U4.59 X1.GND1
GND1 [power]: C18.C C19.2 C20.2 C21.2 C22.2 C23.2 C24.2 C25.2 C26.1 C27.1 C28.1 C29.1 C30.2 C31.2 C32.2 C33.2 C34.2 JP3.5 JP7.1 JP8.4 JP10.10 R28.1 R29.1 R31.1 R34.2 S5.1 S6.1 S6.2 U5.6 U5.18 U5.25 U5.42 U5.50 U5.59 U6.2 U7.6 U7.CD2 U7.GND1 U8.2 X2.GND1
GND2 [power]: C35.C C36.2 C37.2 C38.2 C39.2 C40.2 C41.2 C42.2 C43.1 C44.1 C45.1 C46.1 C47.2 C48.2 C49.2 C50.2 C51.2 JP11.5 JP12.1 JP13.4 JP15.10 R45.1 R46.1 R48.1 R51.2 S8.1 S9.1 S9.2 U9.6 U9.18 U9.25 U9.42 U9.50 U9.59 U10.2 U11.6 U11.CD2 U11.GND1 U12.2 X3.GND1
GND3 [power]: C52.C C53.2 C54.2 C55.2 C56.2 C57.2 C58.2 C59.2 C60.1 C61.1 C62.1 C63.1 C64.2 C65.2 C66.2 C67.2 C68.2 JP16.5 JP17.1 JP18.4 JP20.10 R62.1 R63.1 R65.1 R68.2 S11.1 S12.1 S12.2 U13.6 U13.18 U13.25 U13.42 U13.50 U13.59 U14.2 U15.6 U15.CD2 U15.GND1 U16.2 X4.GND1
GND4 [power]: C69.C C70.2 C71.2 C72.2 C73.2 C74.2 C75.2 C76.2 C77.1 C78.1 C79.1 C80.1 C81.2 C82.2 C83.2 C84.2 C85.2 JP21.5 JP22.1 JP23.4 JP25.10 R79.1 R80.1 R82.1 R85.2 S14.1 S15.1 S15.2 U17.6 U17.18 U17.25 U17.42 U17.50 U17.59 U18.2 U19.6 U19.CD2 U19.GND1 U20.2 X5.GND1
GND5 [power]: C86.C C87.2 C88.2 C89.2 C90.2 C91.2 C92.2 C93.2 C94.1 C95.1 C96.1 C97.1 C98.2 C99.2 C100.2 C101.2 C102.2 JP26.5 JP27.1 JP28.4 JP30.10 R96.1 R97.1 R99.1 R102.2 S17.1 S18.1 S18.2 U21.6 U21.18 U21.25 U21.42 U21.50 U21.59 U22.2 U23.6 U23.CD2 U23.GND1 U24.2 X6.GND1
MISO0: U3.7 U4.29
MISO1: JP4.3 U4.53
MISO2: U5.29 U7.7
MISO3: JP9.3 U5.53
MISO4: U9.29 U11.7
MISO5: JP14.3 U9.53
MISO6: U13.29 U15.7
MISO7: JP19.3 U13.53
MISO8: U17.29 U19.7
MISO9: JP24.3 U17.53
MISO10: U21.29 U23.7
MISO11: JP29.3 U21.53
MOSI0: U3.3 U4.30
MOSI1: JP4.2 U4.54
MOSI2: U5.30 U7.3
MOSI3: JP9.2 U5.54
MOSI4: U9.30 U11.3
MOSI5: JP14.2 U9.54
MOSI6: U13.30 U15.3
MOSI7: JP19.2 U13.54
MOSI8: U17.30 U19.3
MOSI9: JP24.2 U17.54
MOSI10: U21.30 U23.3
MOSI11: JP29.2 U21.54
N$1: R2.2 U1.5
N$2: R22.1 U5.58
N$3: Q6.1 R26.2 R27.1
N$4: R26.1 U5.17
N$5: C13.2 Q1.3 U4.62
N$6: C16.2 Q2.X2 U4.3
N$7: LED2.A R4.2
N$8: LED5.C R29.2
N$9: C15.2 Q2.X1 U4.5
N$10: LED6.A R19.2
N$11: LED7.A R20.2
N$12: LED1.C U1.1
N$13: LED1.A R3.1
N$14: C26.2 Q3.3 U5.62
N$15: C27.2 Q3.1 U5.61
N$16: R8.1 U4.58
N$17: Q4.1 R12.2 R13.1
N$18: C29.2 Q5.X2 U5.3
N$19: LED4.A R5.2
N$20: C28.2 Q5.X1 U5.5
N$21: C14.2 Q1.1 U4.61
N$22: LED8.C U8.1
N$23: LED8.A R32.1
N$24: R31.2 U8.5
N$25: R39.1 U9.58
N$26: Q9.1 R43.2 R44.1
N$27: R43.1 U9.17
N$28: LED9.C R46.2
N$29: LED10.A R36.2
N$30: LED11.A R37.2
N$31: R12.1 U4.17
N$32: C43.2 Q7.3 U9.62
N$33: LED3.C R15.2
N$34: C44.2 Q7.1 U9.61
N$35: C46.2 Q8.X2 U9.3
N$36: C45.2 Q8.X1 U9.5
N$37: LED12.C U12.1
N$38: LED12.A R49.1
N$39: R48.2 U12.5
N$40: R56.1 U13.58
N$41: Q12.1 R60.2 R61.1
N$42: R60.1 U13.17
N$43: LED13.C R63.2
N$44: LED14.A R53.2
N$45: LED15.A R54.2
N$46: C60.2 Q10.3 U13.62
N$47: C61.2 Q10.1 U13.61
N$48: C63.2 Q11.X2 U13.3
N$49: C62.2 Q11.X1 U13.5
N$50: LED16.C U16.1
N$51: LED16.A R66.1
N$52: R65.2 U16.5
N$53: R73.1 U17.58
N$54: Q15.1 R77.2 R78.1
N$55: R77.1 U17.17
N$56: LED17.C R80.2
N$57: LED18.A R70.2
N$58: LED19.A R71.2
N$59: C77.2 Q13.3 U17.62
N$60: C78.2 Q13.1 U17.61
N$61: C80.2 Q14.X2 U17.3
N$62: C79.2 Q14.X1 U17.5
N$63: LED20.C U20.1
N$64: LED20.A R83.1
N$65: R82.2 U20.5
N$66: R90.1 U21.58
N$67: Q18.1 R94.2 R95.1
N$68: R94.1 U21.17
N$69: LED21.C R97.2
N$70: LED22.A R87.2
N$71: LED23.A R88.2
N$72: C94.2 Q16.3 U21.62
N$73: C95.2 Q16.1 U21.61
N$74: C97.2 Q17.X2 U21.3
N$75: C96.2 Q17.X1 U21.5
N$76: LED24.C U24.1
N$77: LED24.A R100.1
N$78: R99.2 U24.5
P1: JP6.2 U4.15
P2: JP6.3 U4.14
P3: JP6.4 U4.13
P4: JP6.5 U4.9
P5: JP6.6 U4.2
P6: JP6.7 U4.1
P7: JP6.8 U4.35
P8: JP6.9 U4.38
P9: JP10.5 U5.9
P10: JP10.4 U5.13
P11: JP10.3 U5.14
P12: JP10.2 U5.15
P13: JP10.8 U5.35
P14: JP10.9 U5.38
P15: JP10.7 U5.1
P16: JP10.6 U5.2
P17: JP15.5 U9.9
P18: JP15.4 U9.13
P19: JP15.3 U9.14
P20: JP15.2 U9.15
P21: JP15.8 U9.35
P22: JP15.9 U9.38
P23: JP15.7 U9.1
P24: JP15.6 U9.2
P25: JP20.5 U13.9
P26: JP20.4 U13.13
P27: JP20.3 U13.14
P28: JP20.2 U13.15
P29: JP20.8 U13.35
P30: JP20.9 U13.38
P31: JP20.7 U13.1
P32: JP20.6 U13.2
P33: JP25.5 U17.9
P34: JP25.4 U17.13
P35: JP25.3 U17.14
P36: JP25.2 U17.15
P37: JP25.8 U17.35
P38: JP25.9 U17.38
P39: JP25.7 U17.1
P40: JP25.6 U17.2
P41: JP30.5 U21.9
P42: JP30.4 U21.13
P43: JP30.3 U21.14
P44: JP30.2 U21.15
P45: JP30.8 U21.35
P46: JP30.9 U21.38
P47: JP30.7 U21.1
P48: JP30.6 U21.2
P-D+: C3.1 R9.1 U4.10
P-D+1: C20.1 R23.1 U5.10
P-D+2: C37.1 R40.1 U9.10
P-D+3: C54.1 R57.1 U13.10
P-D+4: C71.1 R74.1 U17.10
P-D+5: C88.1 R91.1 U21.10
P-D-: C4.1 R10.1 U4.11
P-D-1: C21.1 R24.1 U5.11
P-D-2: C38.1 R41.1 U9.11
P-D-3: C55.1 R58.1 U13.11
P-D-4: C72.1 R75.1 U17.11
P-D-5: C89.1 R92.1 U21.11
RAW: JP5.1 R16.1 S1.1 U2.1 U2.3
RAW1: JP8.1 R33.1 S4.1 U6.1 U6.3
RAW2: JP13.1 R50.1 S7.1 U10.1 U10.3
RAW3: JP18.1 R67.1 S10.1 U14.1 U14.3
RAW4: JP23.1 R84.1 S13.1 U18.1 U18.3
RAW5: JP28.1 R101.1 S16.1 U22.1 U22.3
RST: JP1.2 R1.1 S3.3 S3.4 U4.57
RST1: JP3.2 R18.1 S6.3 S6.4 U5.57
RST2: JP11.2 R35.1 S9.3 S9.4 U9.57
RST3: JP16.2 R52.1 S12.3 S12.4 U13.57
RST4: JP21.2 R69.1 S15.3 S15.4 U17.57
RST5: JP26.2 R86.1 S18.3 S18.4 U21.57
RXI-0: JP1.4 U4.21
RXI-1: JP5.6 U4.34
RXI-2: JP3.4 U5.21
RXI-3: JP8.6 U5.34
RXI-4: JP11.4 U9.21
RXI-5: JP13.6 U9.34
RXI-6: JP16.4 U13.21
RXI-7: JP18.6 U13.34
RXI-8: JP21.4 U17.21
RXI-9: JP23.6 U17.34
RXI-10: JP26.4 U21.21
RXI-11: JP28.6 U21.34
SCK0: U3.5 U4.27
SCK1: JP4.4 U4.47
SCK2: U5.27 U7.5
SCK3: JP9.4 U5.47
SCK4: U9.27 U11.5
SCK5: JP14.4 U9.47
SCK6: U13.27 U15.5
SCK7: JP19.4 U13.47
SCK8: U17.27 U19.5
SCK9: JP24.4 U17.47
SCK10: U21.27 U23.5
SCK11: JP29.4 U21.47
STAT: LED3.A Q4.3 R11.1
STAT0: LED2.C U4.22
STAT1: LED4.C U4.37
STAT2: LED6.C U5.22
STAT3: LED7.C U5.37
STAT4: LED5.A Q6.3 R25.1
STAT5: LED10.C U9.22
STAT6: LED11.C U9.37
STAT7: LED9.A Q9.3 R42.1
STAT8: LED14.C U13.22
STAT9: LED15.C U13.37
STAT10: LED13.A Q12.3 R59.1
STAT11: LED18.C U17.22
STAT12: LED19.C U17.37
STAT13: LED17.A Q15.3 R76.1
STAT14: LED22.C U21.22
STAT15: LED23.C U21.37
STAT16: LED21.A Q18.3 R93.1
STOP: C1.1 JP6.1 R6.1 S2.3 U4.26
STOP1: C30.1 JP10.1 R30.1 S5.3 U5.26
STOP2: C47.1 JP15.1 R47.1 S8.3 U9.26
STOP3: C64.1 JP20.1 R64.1 S11.3 U13.26
STOP4: C81.1 JP25.1 R81.1 S14.3 U17.26
STOP5: C98.1 JP30.1 R98.1 S17.3 U21.26
TXO-0: JP1.3 U4.19
TXO-1: JP5.5 U4.33
TXO-2: JP3.3 U5.19
TXO-3: JP8.5 U5.33
TXO-4: JP11.3 U9.19
TXO-5: JP13.5 U9.33
TXO-6: JP16.3 U13.19
TXO-7: JP18.5 U13.33
TXO-8: JP21.3 U17.19
TXO-9: JP23.5 U17.33
TXO-10: JP26.3 U21.19
TXO-11: JP28.5 U21.33
USB_D+: R9.2 R11.2 X1.D+1
USB_D+1: R23.2 R25.2 X2.D+1
USB_D+2: R40.2 R42.2 X3.D+1
USB_D+3: R57.2 R59.2 X4.D+1
USB_D+4: R74.2 R76.2 X5.D+1
USB_D+5: R91.2 R93.2 X6.D+1
USB_D-: R10.2 X1.D-1
USB_D-1: R24.2 X2.D-1
USB_D-2: R41.2 X3.D-1
USB_D-3: R58.2 X4.D-1
USB_D-4: R75.2 X5.D-1
USB_D-5: R92.2 X6.D-1
USB_VIN: C2.1 C17.1 JP5.2 R3.2 R8.2 R14.2 U1.4 X1.VBUS1
USB_VIN1: C19.1 C34.1 JP8.2 R22.2 R28.2 R32.2 U8.4 X2.VBUS1
USB_VIN2: C36.1 C51.1 JP13.2 R39.2 R45.2 R49.2 U12.4 X3.VBUS1
USB_VIN3: C53.1 C68.1 JP18.2 R56.2 R62.2 R66.2 U16.4 X4.VBUS1
USB_VIN4: C70.1 C85.1 JP23.2 R73.2 R79.2 R83.2 U20.4 X5.VBUS1
USB_VIN5: C87.1 C102.1 JP28.2 R90.2 R96.2 R100.2 U24.4 X6.VBUS1
VCC: C6.A C7.1 C8.1 C9.1 C10.1 C11.1 C12.1 JP1.6 JP5.3 Q4.2 R1.2 R4.1 R5.1 R6.2 R7.1 R13.2 U2.5 U3.4 U4.7 U4.23 U4.43 U4.49 U4.51 U4.63
VCC1: C18.A C22.1 C23.1 C24.1 C25.1 C32.1 C33.1 JP3.6 JP8.3 Q6.2 R18.2 R19.1 R20.1 R21.1 R27.2 R30.2 U5.7 U5.23 U5.43 U5.49 U5.51 U5.63 U6.5 U7.4
VCC2: C35.A C39.1 C40.1 C41.1 C42.1 C49.1 C50.1 JP11.6 JP13.3 Q9.2 R35.2 R36.1 R37.1 R38.1 R44.2 R47.2 U9.7 U9.23 U9.43 U9.49 U9.51 U9.63 U10.5 U11.4
VCC3: C52.A C56.1 C57.1 C58.1 C59.1 C66.1 C67.1 JP16.6 JP18.3 Q12.2 R52.2 R53.1 R54.1 R55.1 R61.2 R64.2 U13.7 U13.23 U13.43 U13.49 U13.51 U13.63 U14.5 U15.4
VCC4: C69.A C73.1 C74.1 C75.1 C76.1 C83.1 C84.1 JP21.6 JP23.3 Q15.2 R69.2 R70.1 R71.1 R72.1 R78.2 R81.2 U17.7 U17.23 U17.43 U17.49 U17.51 U17.63 U18.5 U19.4
VCC5: C86.A C90.1 C91.1 C92.1 C93.1 C100.1 C101.1 JP26.6 JP28.3 Q18.2 R86.2 R87.1 R88.1 R89.1 R95.2 R98.2 U21.7 U21.23 U21.43 U21.49 U21.51 U21.63 U22.5 U23.4
VLIPO [power]: C5.1 JP2.2 S1.2 U1.3
VLIPO1 [power]: C31.1 JP7.2 S4.2 U8.3
VLIPO2 [power]: C48.1 JP12.2 S7.2 U12.3
VLIPO3 [power]: C65.1 JP17.2 S10.2 U16.3
VLIPO4 [power]: C82.1 JP22.2 S13.2 U20.3
VLIPO5 [power]: C99.1 JP27.2 S16.2 U24.3

## Tracks (layer width: path | path; a pad name or v marks a point on that pad's centre or on a via)
BATTLVL  (via drill 0.51)
  Top 0.254: U4.39 35.55,37.96 v35.69,38.1 | R16.2 R17.1 21.46,27.18 v22.1,26.54
  Bottom 0.254: v35.69,38.1 33.66,36.07 28.45,36.07 22.1,29.72 v22.1,26.54
BATTLVL1  (via drill 0.51)
  Top 0.254: U5.39 100.32,37.96 v100.46,38.1 | R33.2 R34.1 86.23,27.18 v86.87,26.54
  Bottom 0.254: v100.46,38.1 98.42,36.07 93.22,36.07 86.87,29.72 v86.87,26.54
BATTLVL2  (via drill 0.51)
  Top 0.254: U9.39 35.55,76.57 v35.69,76.71 | R50.2 R51.1 21.46,65.79 v22.1,65.15
  Bottom 0.254: v35.69,76.71 33.66,74.68 28.45,74.68 22.1,68.33 v22.1,65.15
BATTLVL3  (via drill 0.51)
  Top 0.254: U13.39 100.32,76.57 v100.46,76.71 | R67.2 R68.1 86.23,65.79 v86.87,65.15
  Bottom 0.254: v100.46,76.71 98.42,74.68 93.22,74.68 86.87,68.33 v86.87,65.15
BATTLVL4  (via drill 0.51)
  Top 0.254: U17.39 35.55,115.18 v35.69,115.32 | R84.2 R85.1 21.46,104.39 v22.1,103.76
  Bottom 0.254: v35.69,115.32 33.66,113.28 28.45,113.28 22.1,106.93 v22.1,103.76
BATTLVL5  (via drill 0.51)
  Top 0.254: U21.39 100.32,115.18 v100.46,115.32 | R101.2 R102.1 86.23,104.39 v86.87,103.76
  Bottom 0.254: v100.46,115.32 98.42,113.28 93.22,113.28 86.87,106.93 v86.87,103.76
BSL
  Top 0.254: U4.41 34.54,35.31 34.54,38.61 | JP1.1 43.69,40.26 42.67,39.24 35.18,39.24 34.54,38.61 | 34.54,38.61 R7.2
BSL1
  Top 0.254: U5.41 99.31,35.31 99.31,38.61 | JP3.1 108.46,40.26 107.44,39.24 99.95,39.24 99.31,38.61 | 99.31,38.61 R21.2
BSL2
  Top 0.254: U9.41 34.55,73.92 34.54,73.91 34.54,77.22 | JP11.1 43.69,78.87 42.67,77.85 35.18,77.85 34.54,77.22 | 34.54,77.22 R38.2
BSL3
  Top 0.254: U13.41 99.32,73.92 99.31,73.91 99.31,77.22 | JP16.1 108.46,78.87 107.44,77.85 99.95,77.85 99.31,77.22 | 99.31,77.22 R55.2
BSL4
  Top 0.254: U17.41 34.54,115.82 | JP21.1 43.69,117.47 42.67,116.46 35.18,116.46 34.54,115.82 | 34.54,115.82 R72.2
BSL5
  Top 0.254: U21.41 99.31,115.82 | JP26.1 108.46,117.47 107.44,116.46 99.95,116.46 99.31,115.82 | 99.31,115.82 R89.2
CS0
  Top 0.254: U4.31 44.4,32.97 46.23,34.8 57.66,34.8 59.98,32.48 U3.2
CS1  (via drill 0.51)
  Top 0.254: U4.55 31,30.47 v31.62,29.84
  Bottom 0.254: JP4.1 20.83,9.4 24.64,13.21 24.64,22.61 31.62,29.59 v31.62,29.84
CS2
  Top 0.254: U5.31 109.17,32.97 111,34.8 122.43,34.8 124.75,32.48 U7.2
CS3  (via drill 0.51)
  Top 0.254: U5.55 95.77,30.47 v96.39,29.84
  Bottom 0.254: JP9.1 85.6,9.4 89.41,13.21 89.41,22.61 96.39,29.59 v96.39,29.84
CS4
  Top 0.254: U9.31 44.4,71.58 46.23,73.41 57.66,73.41 59.98,71.09 U11.2
CS5  (via drill 0.51)
  Top 0.254: U9.55 31,69.08 v31.62,68.45
  Bottom 0.254: JP14.1 20.83,48.01 24.64,51.82 24.64,61.21 31.62,68.2 v31.62,68.45
CS6
  Top 0.254: U13.31 109.17,71.58 111,73.41 122.43,73.41 124.75,71.09 U15.2
CS7  (via drill 0.51)
  Top 0.254: U13.55 95.77,69.08 v96.39,68.45
  Bottom 0.254: JP19.1 85.6,48.01 89.41,51.82 89.41,61.21 96.39,68.2 v96.39,68.45
CS8
  Top 0.254: U17.31 44.4,110.18 46.23,112.01 57.66,112.01 59.98,109.69 U19.2
CS9  (via drill 0.51)
  Top 0.254: U17.55 31,107.68 v31.62,107.06
  Bottom 0.254: JP24.1 20.83,86.61 24.64,90.42 24.64,99.82 31.62,106.81 v31.62,107.06
CS10
  Top 0.254: U21.31 109.17,110.18 111,112.01 122.43,112.01 124.75,109.69 U23.2
CS11  (via drill 0.51)
  Top 0.254: U21.55 95.77,107.68 v96.39,107.06
  Bottom 0.254: JP29.1 85.6,86.61 89.41,90.42 89.41,99.82 96.39,106.81 v96.39,107.06
GND  (via drill 0.51)
  Top 0.254: U4.25 41.78,29.97 | v34.04,33.53 v34.05,33.54 U4.42 34.05,37.07 33.78,37.34 C9.2 32.89,37.34 | U4.6 33.55,25.25 33.27,25.53 | U4.18 41.6,26.47 41.91,26.16 41.91,25.65 v42.16,25.4 | 31.88,27.81 31.22,28.47 U4.59 27.67,28.47 26.8,29.34 26.8,30.35 26.04,30.35 25.65,30.73 | C7.2 27.6,38.19 v28.45,37.34 | U4.50 27.89,32.97 27.81,32.89
  other vias: 34.8,16.76 60.2,41.15 25.27,30.99 56.39,16.76 42.42,17.02 34.8,27.18 17.02,20.83 33.02,25.78 49.4,27.18 28.45,20.83 14.48,29.72 50.04,11.94 57.02,22.1 17.02,24.64 53.85,32.26 56.39,28.45 22.1,36.07 19.81,23.88 28.45,15.75
  pour Top (isolate 0.305): 6.86,6.86 67.82,6.86 67.82,44.96 6.86,44.96
  pour Bottom (isolate 0.305): 6.86,6.86 67.82,6.86 67.82,44.96 6.86,44.96
GND1  (via drill 0.51)
  Top 0.254: U5.25 106.55,29.97 | v98.81,33.53 v98.82,33.54 U5.42 98.82,37.07 98.55,37.34 C24.2 97.66,37.34 | U5.6 98.32,25.25 98.04,25.53 | U5.18 106.37,26.47 106.68,26.16 106.68,25.65 v106.93,25.4 | 96.65,27.81 95.99,28.47 U5.59 92.44,28.47 91.57,29.34 91.57,30.35 90.81,30.35 90.42,30.73 | C22.2 92.37,38.19 v93.22,37.34 | U5.50 92.66,32.97 92.58,32.89
  other vias: 99.57,16.76 124.97,41.15 90.04,30.99 121.16,16.76 107.19,17.02 99.57,27.18 81.79,20.83 97.79,25.78 114.17,27.18 93.22,20.83 79.25,29.72 114.81,11.94 121.79,22.1 81.79,24.64 118.62,32.26 121.16,28.45 86.87,36.07 84.58,23.88 93.22,15.75
  pour Top (isolate 0.305): 71.63,6.86 132.59,6.86 132.59,44.96 71.63,44.96
  pour Bottom (isolate 0.305): 71.63,6.86 132.59,6.86 132.59,44.96 71.63,44.96
GND2  (via drill 0.51)
  Top 0.254: U9.25 41.78,68.58 | v34.04,72.14 v34.05,72.15 U9.42 34.05,75.68 33.78,75.95 C41.2 32.89,75.95 | U9.6 33.55,63.86 33.27,64.14 | U9.18 41.6,65.08 41.91,64.77 41.91,64.26 v42.16,64.01 | 31.88,66.42 31.22,67.08 U9.59 27.67,67.08 26.8,67.94 26.8,68.96 26.04,68.96 25.65,69.34 | C39.2 27.6,76.8 v28.45,75.95 | U9.50 27.89,71.58 27.81,71.5
  other vias: 34.8,55.37 60.2,79.76 25.27,69.6 56.39,55.37 42.42,55.63 34.8,65.79 17.02,59.44 33.02,64.39 49.4,65.79 28.45,59.44 14.48,68.33 50.04,50.55 57.02,60.71 17.02,63.25 53.85,70.87 56.39,67.06 22.1,74.68 19.81,62.48 28.45,54.36
  pour Top (isolate 0.305): 6.86,45.47 67.82,45.47 67.82,83.57 6.86,83.57
  pour Bottom (isolate 0.305): 6.86,45.47 67.82,45.47 67.82,83.57 6.86,83.57
GND3  (via drill 0.51)
  Top 0.254: U13.25 106.55,68.58 | v98.81,72.14 v98.82,72.15 U13.42 98.82,75.68 98.55,75.95 C58.2 97.66,75.95 | U13.6 98.32,63.86 98.04,64.14 | U13.18 106.37,65.08 106.68,64.77 106.68,64.26 v106.93,64.01 | 96.65,66.42 95.99,67.08 U13.59 92.44,67.08 91.57,67.94 91.57,68.96 90.81,68.96 90.42,69.34 | C56.2 92.37,76.8 v93.22,75.95 | U13.50 92.66,71.58 92.58,71.5
  other vias: 99.57,55.37 124.97,79.76 90.04,69.6 121.16,55.37 107.19,55.63 99.57,65.79 81.79,59.44 97.79,64.39 114.17,65.79 93.22,59.44 79.25,68.33 114.81,50.55 121.79,60.71 81.79,63.25 118.62,70.87 121.16,67.06 86.87,74.68 84.58,62.48 93.22,54.36
  pour Top (isolate 0.305): 71.63,45.47 132.59,45.47 132.59,83.57 71.63,83.57
  pour Bottom (isolate 0.305): 71.63,45.47 132.59,45.47 132.59,83.57 71.63,83.57
GND4  (via drill 0.51)
  Top 0.254: U17.25 41.78,107.18 41.78,107.19 | v34.04,110.74 34.05,110.76 U17.42 34.05,114.29 33.78,114.55 C75.2 32.89,114.55 | U17.6 33.55,102.47 33.27,102.74 | U17.18 41.6,103.68 41.91,103.38 41.91,102.87 v42.16,102.62 | 31.88,105.03 31.22,105.68 U17.59 27.67,105.68 26.8,106.55 26.8,107.57 26.04,107.57 25.65,107.95 | C73.2 27.6,115.4 v28.45,114.55 | U17.50 27.89,110.18 27.81,110.11
  other vias: 34.8,93.98 60.2,118.36 25.27,108.2 56.39,93.98 42.42,94.23 34.8,104.39 17.02,98.04 33.02,103 49.4,104.39 28.45,98.04 14.48,106.93 50.04,89.15 57.02,99.31 17.02,101.85 53.85,109.47 56.39,105.66 22.1,113.28 19.81,101.09 28.45,92.96
  pour Top (isolate 0.305): 6.86,84.07 67.82,84.07 67.82,122.17 6.86,122.17
  pour Bottom (isolate 0.305): 6.86,84.07 67.82,84.07 67.82,122.17 6.86,122.17
GND5  (via drill 0.51)
  Top 0.254: U21.25 106.55,107.18 106.55,107.19 | v98.81,110.74 98.82,110.76 U21.42 98.82,114.29 98.55,114.55 C92.2 97.66,114.55 | U21.6 98.32,102.47 98.04,102.74 | U21.18 106.37,103.68 106.68,103.38 106.68,102.87 v106.93,102.62 | 96.65,105.03 95.99,105.68 U21.59 92.44,105.68 91.57,106.55 91.57,107.57 90.81,107.57 90.42,107.95 | C90.2 92.37,115.4 v93.22,114.55 | U21.50 92.66,110.18 92.58,110.11
  other vias: 99.57,93.98 124.97,118.36 90.04,108.2 121.16,93.98 107.19,94.23 99.57,104.39 81.79,98.04 97.79,103 114.17,104.39 93.22,98.04 79.25,106.93 114.81,89.15 121.79,99.31 81.79,101.85 118.62,109.47 121.16,105.66 86.87,113.28 84.58,101.09 93.22,92.96
  pour Top (isolate 0.305): 71.63,84.07 132.59,84.07 132.59,122.17 71.63,122.17
  pour Bottom (isolate 0.305): 71.63,84.07 132.59,84.07 132.59,122.17 71.63,122.17
MISO0
  Top 0.254: U4.29 43.98,31.97 47.5,28.45 53.85,28.45 55.32,26.98 U3.7
MISO1  (via drill 0.51)
  Top 0.254: U4.53 30.58,31.47 v30.99,31.88
  Bottom 0.254: JP4.3 18.29,10.67 19.56,10.67 22.1,13.21 22.1,22.99 v30.99,31.88
MISO2
  Top 0.254: U5.29 108.75,31.97 112.27,28.45 118.62,28.45 120.09,26.98 U7.7
MISO3  (via drill 0.51)
  Top 0.254: U5.53 95.35,31.47 v95.76,31.88
  Bottom 0.254: JP9.3 83.06,10.67 84.33,10.67 86.87,13.21 86.87,22.99 v95.76,31.88
MISO4
  Top 0.254: U9.29 43.98,70.58 47.5,67.06 53.85,67.06 55.32,65.59 U11.7
MISO5  (via drill 0.51)
  Top 0.254: U9.53 30.58,70.08 v30.99,70.48
  Bottom 0.254: JP14.3 18.29,49.28 19.56,49.28 22.1,51.82 22.1,61.59 v30.99,70.48
MISO6
  Top 0.254: U13.29 108.75,70.58 112.27,67.06 118.62,67.06 120.09,65.59 U15.7
MISO7  (via drill 0.51)
  Top 0.254: U13.53 95.35,70.08 v95.76,70.48
  Bottom 0.254: JP19.3 83.06,49.28 84.33,49.28 86.87,51.82 86.87,61.59 v95.76,70.48
MISO8
  Top 0.254: U17.29 43.98,109.18 47.5,105.66 53.85,105.66 55.32,104.19 U19.7
MISO9  (via drill 0.51)
  Top 0.254: U17.53 30.58,108.68 v30.99,109.09
  Bottom 0.254: JP24.3 18.29,87.88 19.56,87.88 22.1,90.42 22.1,100.2 v30.99,109.09
MISO10
  Top 0.254: U21.29 108.75,109.18 112.27,105.66 118.62,105.66 120.09,104.19 U23.7
MISO11  (via drill 0.51)
  Top 0.254: U21.53 95.35,108.68 v95.76,109.09
  Bottom 0.254: JP29.3 83.06,87.88 84.33,87.88 86.87,90.42 86.87,100.2 v95.76,109.09
MOSI0
  Top 0.254: U4.30 45.17,32.47 46.86,34.16 57.02,34.16 59.81,31.38 U3.3
MOSI1  (via drill 0.51)
  Top 0.254: U4.54 31.35,30.97 v32.26,31.88
  Bottom 0.254: JP4.2 23.37,13.21 23.37,22.99 v32.26,31.88
MOSI2
  Top 0.254: U5.30 109.94,32.47 111.63,34.16 121.79,34.16 124.58,31.38 U7.3
MOSI3  (via drill 0.51)
  Top 0.254: U5.54 96.12,30.97 v97.03,31.88
  Bottom 0.254: JP9.2 88.14,13.21 88.14,22.99 v97.03,31.88
MOSI4
  Top 0.254: U9.30 45.17,71.08 46.86,72.77 57.02,72.77 59.81,69.99 U11.3
MOSI5  (via drill 0.51)
  Top 0.254: U9.54 31.35,69.58 v32.26,70.48
  Bottom 0.254: JP14.2 23.37,51.82 23.37,61.59 v32.26,70.48
MOSI6
  Top 0.254: U13.30 109.94,71.08 111.63,72.77 121.79,72.77 124.58,69.99 U15.3
MOSI7  (via drill 0.51)
  Top 0.254: U13.54 96.12,69.58 v97.03,70.48
  Bottom 0.254: JP19.2 88.14,51.82 88.14,61.59 v97.03,70.48
MOSI8
  Top 0.254: U17.30 45.17,109.68 46.86,111.38 57.02,111.38 59.81,108.59 U19.3
MOSI9  (via drill 0.51)
  Top 0.254: U17.54 31.35,108.18 v32.26,109.09
  Bottom 0.254: JP24.2 23.37,90.42 23.37,100.2 v32.26,109.09
MOSI10
  Top 0.254: U21.30 109.94,109.68 111.63,111.38 121.79,111.38 124.58,108.59 U23.3
MOSI11  (via drill 0.51)
  Top 0.254: U21.54 96.12,108.18 v97.03,109.09
  Bottom 0.254: JP29.2 88.14,90.42 88.14,100.2 v97.03,109.09
N$1
  Top 0.254: U1.5 18.26,31.65 18.91,31 18.72,31 R2.2
N$2
  Top 0.254: U5.58 93.98,28.96 100.71,28.96 108.58,21.08 111.76,21.08 114.81,18.03 114.81,13.84 115.32,13.34 117.22,13.34 119.89,10.67 122.3,10.67 123.06,11.43 R22.1
N$3
  Top 0.254: 121.12,14.1 R26.2 120.74,14.48 117.35,14.48 116.71,15.11 116.71,15.75 R27.1 116.4,15.85 Q6.1
N$4
  Top 0.254: U5.17 105.17,25.92 105.16,25.91 105.16,25.27 108.33,22.1 112.27,22.1 115.57,18.8 115.57,15.11 116.71,13.97 118.49,13.97 120.1,12.36 R26.1
N$5
  Top 0.254: U4.62 25.78,26.97 25.78,26.92 25.79,26.92 Q1.3 25.49,25.03 C13.2
N$6
  Top 0.254: 32.05,20.62 U4.3 | 30.57,19.98 Q2.X2 31.5,19.56 32.05,20.11 32.05,20.62 | 32.05,20.62 C16.2
N$7
  Top 0.254: R4.2 57.24,41.17 LED2.A
N$8
  Top 0.254: R29.2 116.5,20.86 LED5.C
N$9
  Top 0.254: U4.5 33.05,22.89 32.89,22.73 32.89,20.19 32.64,19.94 32.64,17.65 32,17.02 31.62,17.02 | 31.62,17.02 31.62,16.89 31.84,16.68 C15.2 | 31.62,17.02 Q2.X1
N$10
  Top 0.254: R19.2 122.01,41.17 LED6.A
N$11
  Top 0.254: R20.2 113.96,41.17 LED7.A
N$12
  Top 0.254: U1.1 22.42,32.58 23.75,33.91 23.75,36.06 LED1.C
N$13
  Top 0.254: R3.1 25.39,32.36 25.39,35.94 LED1.A
N$14
  Top 0.254: U5.62 90.55,26.97 90.55,26.92 90.56,26.92 Q3.3 90.26,25.03 C26.2
N$15
  Top 0.254: C27.2 86.87,27.81 87.21,27.47 88.27,27.47 | 88.27,27.47 U5.61 | 88.27,27.47 88.27,27.56 88.26,27.57 Q3.1
N$16
  Top 0.254: U4.58 29.21,28.96 35.94,28.96 43.81,21.08 46.99,21.08 50.04,18.03 50.04,13.84 50.55,13.34 52.45,13.34 55.12,10.67 57.53,10.67 58.29,11.43 R8.1
N$17
  Top 0.254: 56.35,14.1 R12.2 55.97,14.48 52.58,14.48 51.94,15.11 51.94,15.75 R13.1 51.63,15.85 Q4.1
N$18
  Top 0.254: 96.82,20.62 U5.3 | 95.34,19.98 Q5.X2 96.27,19.56 96.82,20.11 96.82,20.62 | 96.82,20.62 C29.2
N$19
  Top 0.254: R5.2 49.19,41.17 LED4.A
N$20
  Top 0.254: U5.5 97.82,22.89 97.66,22.73 97.66,20.19 97.41,19.94 97.41,17.65 96.77,17.02 96.39,17.02 | 96.39,17.02 96.39,16.89 96.61,16.68 C28.2 | 96.39,17.02 Q5.X1
N$21
  Top 0.254: C14.2 22.1,27.81 22.44,27.47 23.5,27.47 | 23.5,27.47 U4.61 | 23.5,27.47 23.5,27.56 23.49,27.57 Q1.1
N$22
  Top 0.254: U8.1 87.19,32.58 88.52,33.91 88.52,36.06 LED8.C
N$23
  Top 0.254: R32.1 90.16,32.36 90.16,35.94 LED8.A
N$24
  Top 0.254: U8.5 83.03,31.65 83.68,31 83.49,31 R31.2
N$25
  Top 0.254: U9.58 29.21,67.56 35.94,67.56 43.81,59.69 46.99,59.69 50.04,56.64 50.04,52.45 50.55,51.94 52.45,51.94 55.12,49.28 57.53,49.28 58.29,50.04 R39.1
N$26
  Top 0.254: 56.35,52.7 R43.2 55.97,53.09 52.58,53.09 51.94,53.72 51.94,54.36 R44.1 51.63,54.46 Q9.1
N$27
  Top 0.254: U9.17 40.4,64.53 40.39,64.52 40.39,63.88 43.56,60.71 47.5,60.71 50.8,57.4 50.8,53.72 51.94,52.58 53.72,52.58 55.33,50.97 R43.1
N$28
  Top 0.254: R46.2 51.73,59.46 LED9.C
N$29
  Top 0.254: R36.2 57.24,79.78 LED10.A
N$30
  Top 0.254: R37.2 49.19,79.78 LED11.A
N$31
  Top 0.254: U4.17 40.4,25.92 40.39,25.91 40.39,25.27 43.56,22.1 47.5,22.1 50.8,18.8 50.8,15.11 51.94,13.97 53.72,13.97 55.33,12.36 R12.1
N$32
  Top 0.254: U9.62 25.78,65.58 25.78,65.53 25.79,65.53 Q7.3 25.49,63.64 C43.2
N$33
  Top 0.254: R15.2 51.73,20.86 LED3.C
N$34
  Top 0.254: C44.2 22.1,66.42 22.44,66.08 23.5,66.08 | 23.5,66.08 U9.61 | 23.5,66.08 23.5,66.17 23.49,66.17 Q7.1
N$35
  Top 0.254: 32.05,59.23 U9.3 | 30.57,58.59 Q8.X2 31.5,58.17 32.05,58.72 32.05,59.23 | 32.05,59.23 C46.2
N$36
  Top 0.254: U9.5 33.05,61.5 32.89,61.34 32.89,58.8 32.64,58.55 32.64,56.26 32,55.63 31.62,55.63 | 31.62,55.63 31.62,55.5 31.84,55.28 C45.2 | 31.62,55.63 Q8.X1
N$37
  Top 0.254: U12.1 22.42,71.19 23.75,72.52 23.75,74.66 LED12.C
N$38
  Top 0.254: R49.1 25.39,70.97 25.39,74.55 LED12.A
N$39
  Top 0.254: U12.5 18.26,70.26 18.91,69.61 18.72,69.61 R48.2
N$40
  Top 0.254: U13.58 93.98,67.56 100.71,67.56 108.58,59.69 111.76,59.69 114.81,56.64 114.81,52.45 115.32,51.94 117.22,51.94 119.89,49.28 122.3,49.28 123.06,50.04 R56.1
N$41
  Top 0.254: 121.12,52.7 R60.2 120.74,53.09 117.35,53.09 116.71,53.72 116.71,54.36 R61.1 116.4,54.46 Q12.1
N$42
  Top 0.254: U13.17 105.17,64.53 105.16,64.52 105.16,63.88 108.33,60.71 112.27,60.71 115.57,57.4 115.57,53.72 116.71,52.58 118.49,52.58 120.1,50.97 R60.1
N$43
  Top 0.254: R63.2 116.5,59.46 LED13.C
N$44
  Top 0.254: R53.2 122.01,79.78 LED14.A
N$45
  Top 0.254: R54.2 113.96,79.78 LED15.A
N$46
  Top 0.254: U13.62 90.55,65.58 90.55,65.53 90.56,65.53 Q10.3 90.26,63.64 C60.2
N$47
  Top 0.254: C61.2 86.87,66.42 87.21,66.08 88.27,66.08 | 88.27,66.08 U13.61 | 88.27,66.08 88.27,66.17 88.26,66.17 Q10.1
N$48
  Top 0.254: 96.82,59.23 U13.3 | 95.34,58.59 Q11.X2 96.27,58.17 96.82,58.72 96.82,59.23 | 96.82,59.23 C63.2
N$49
  Top 0.254: U13.5 97.82,61.5 97.66,61.34 97.66,58.8 97.41,58.55 97.41,56.26 96.77,55.63 96.39,55.63 | 96.39,55.63 96.39,55.5 96.61,55.28 C62.2 | 96.39,55.63 Q11.X1
N$50
  Top 0.254: U16.1 87.19,71.19 88.52,72.52 88.52,74.66 LED16.C
N$51
  Top 0.254: R66.1 90.16,70.97 90.16,74.55 LED16.A
N$52
  Top 0.254: U16.5 83.03,70.26 83.68,69.61 83.49,69.61 R65.2
N$53
  Top 0.254: U17.58 35.94,106.17 43.81,98.3 46.99,98.3 50.04,95.25 50.04,91.06 50.55,90.55 52.45,90.55 55.12,87.88 57.53,87.88 58.29,88.65 R73.1
N$54
  Top 0.254: 56.35,91.31 R77.2 55.97,91.69 52.58,91.69 51.94,92.33 51.94,92.96 R78.1 51.63,93.06 Q15.1
N$55
  Top 0.254: U17.17 40.4,103.14 40.39,103.12 40.39,102.49 43.56,99.31 47.5,99.31 50.8,96.01 50.8,92.33 51.94,91.19 53.72,91.19 55.33,89.57 R77.1
N$56
  Top 0.254: R80.2 51.73,98.07 LED17.C
N$57
  Top 0.254: R70.2 57.24,118.39 LED18.A
N$58
  Top 0.254: R71.2 49.19,118.39 LED19.A
N$59
  Top 0.254: U17.62 25.78,104.18 25.78,104.14 25.79,104.13 Q13.3 25.49,102.24 C77.2
N$60
  Top 0.254: C78.2 22.1,105.03 22.44,104.68 23.5,104.68 | 23.5,104.68 U17.61 | 23.5,104.68 23.5,104.78 23.49,104.78 Q13.1
N$61
  Top 0.254: 32.05,97.83 U17.3 | 30.57,97.19 Q14.X2 31.5,96.77 32.05,97.33 32.05,97.83 | 32.05,97.83 C80.2
N$62
  Top 0.254: U17.5 33.05,100.1 32.89,99.95 32.89,97.41 32.64,97.16 32.64,94.87 32,94.23 31.62,94.23 | 31.62,94.23 31.62,94.11 31.84,93.89 C79.2 | 31.62,94.23 Q14.X1
N$63
  Top 0.254: U20.1 22.42,109.79 23.75,111.12 23.75,113.27 LED20.C
N$64
  Top 0.254: R83.1 25.39,109.57 25.39,113.16 LED20.A
N$65